# Altium PCB LKAS-EPS_PCB_V2I4.PcbDoc (part 1 of 2)
Units mil, origin at the board's own origin, x right, y up, seen from the top; angles counter-clockwise.
Board outline 1945 x 1335 mil, 4 copper layers (Top Layer, Layer 1, Layer 2, Bottom Layer), stack 23.712 mil thick; 51 components, 66 nets, 233 pads, 107 vias.
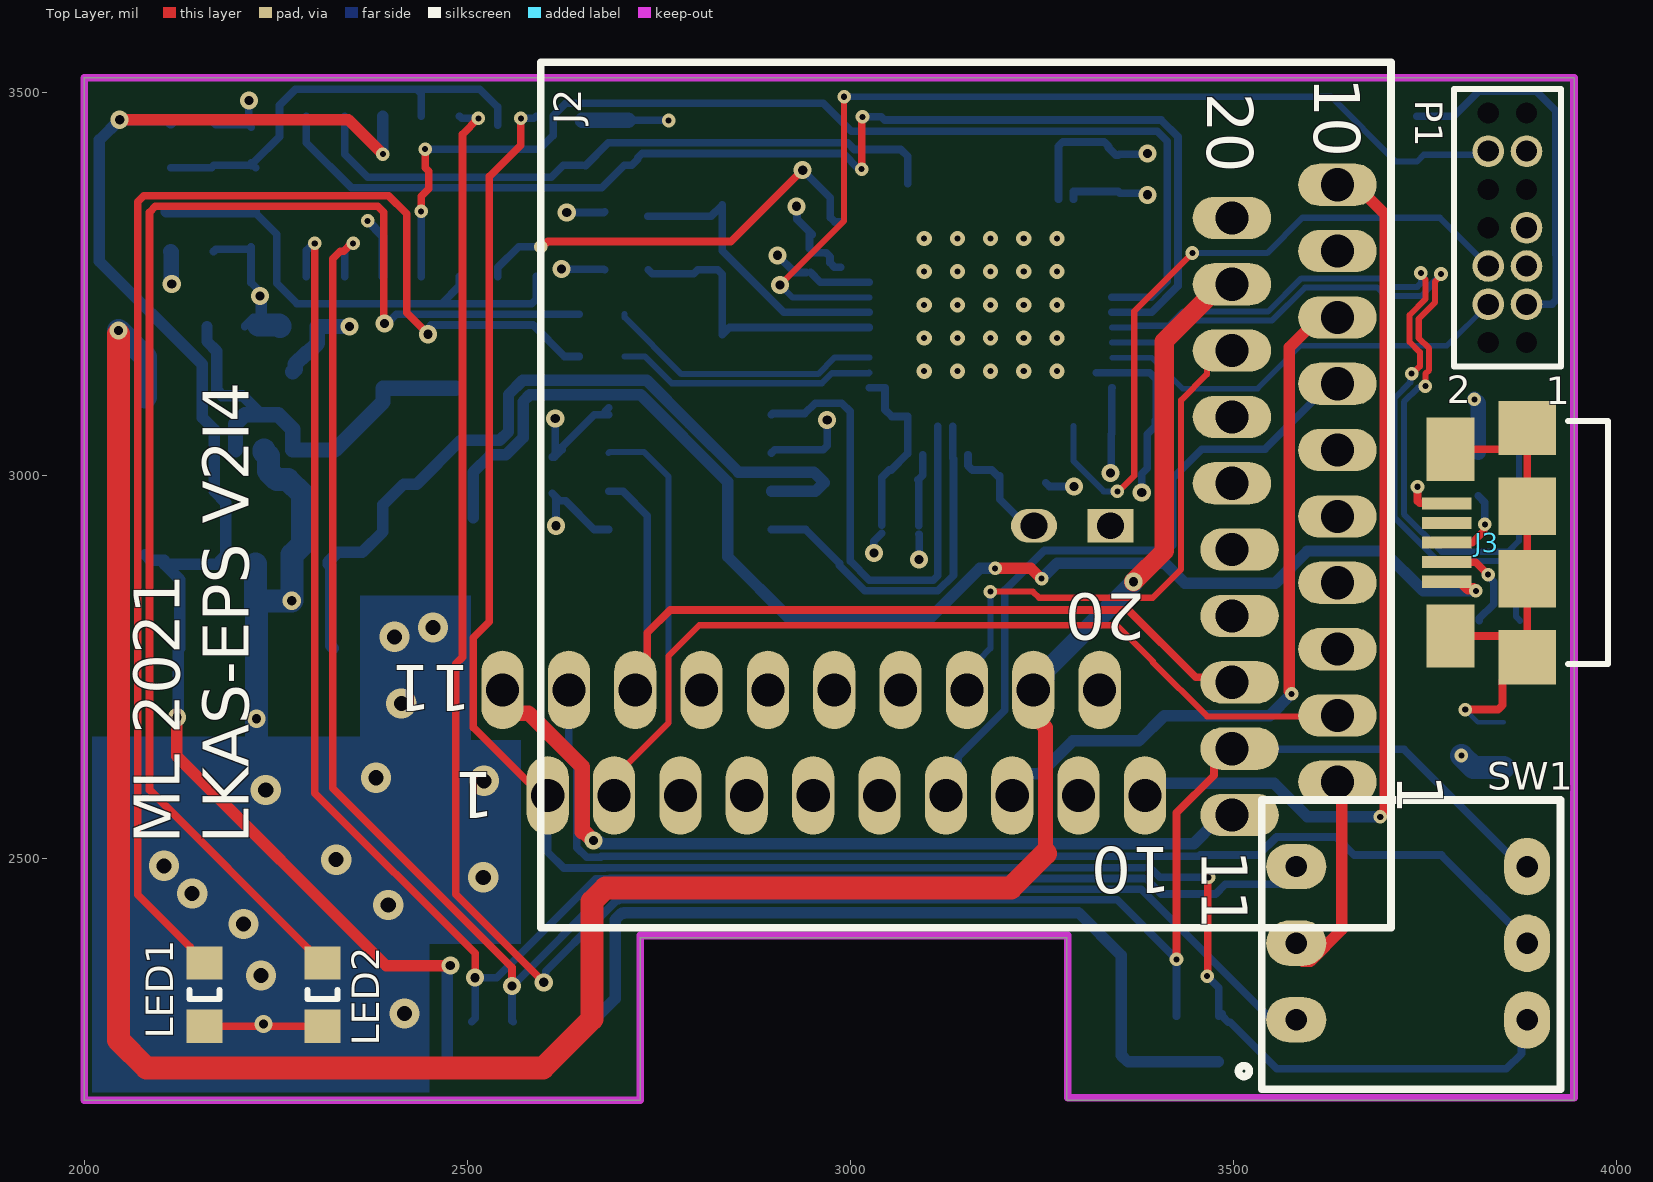
[diagram p0: Top Layer view]
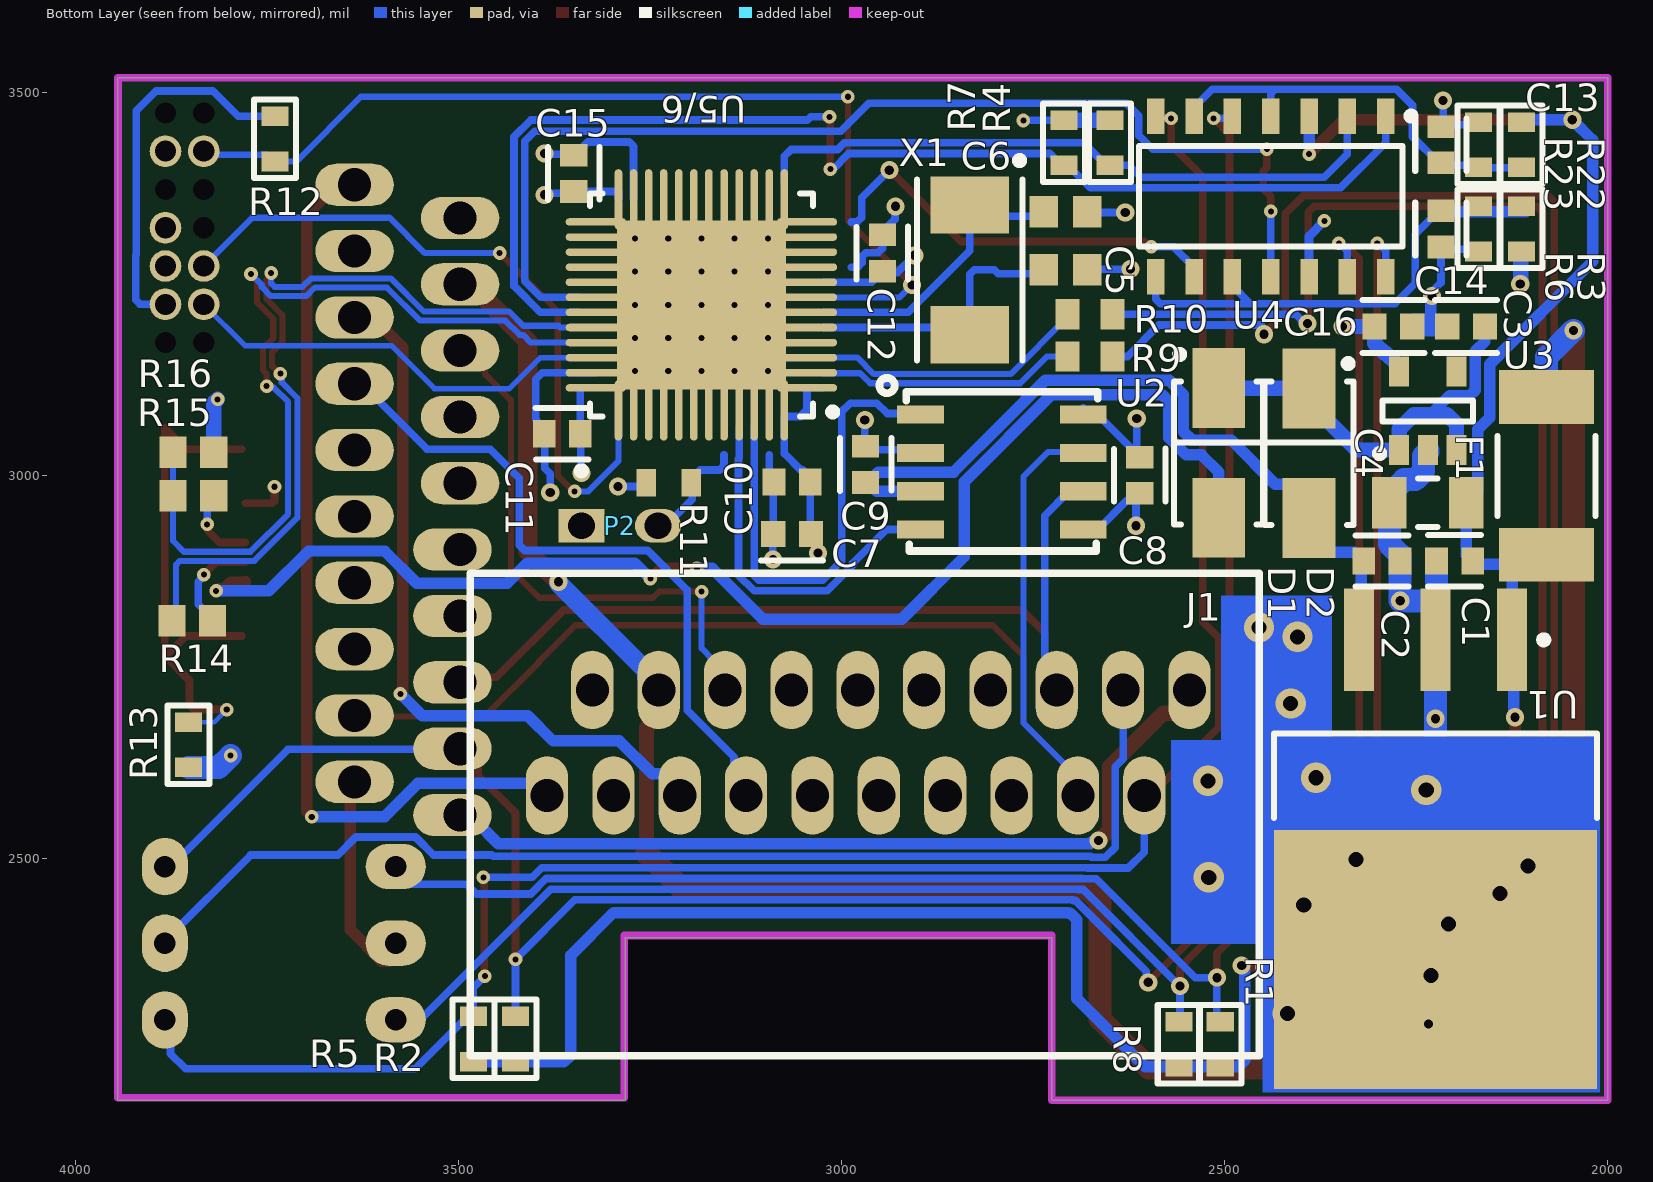
[diagram p1: Bottom Layer view, seen from below]
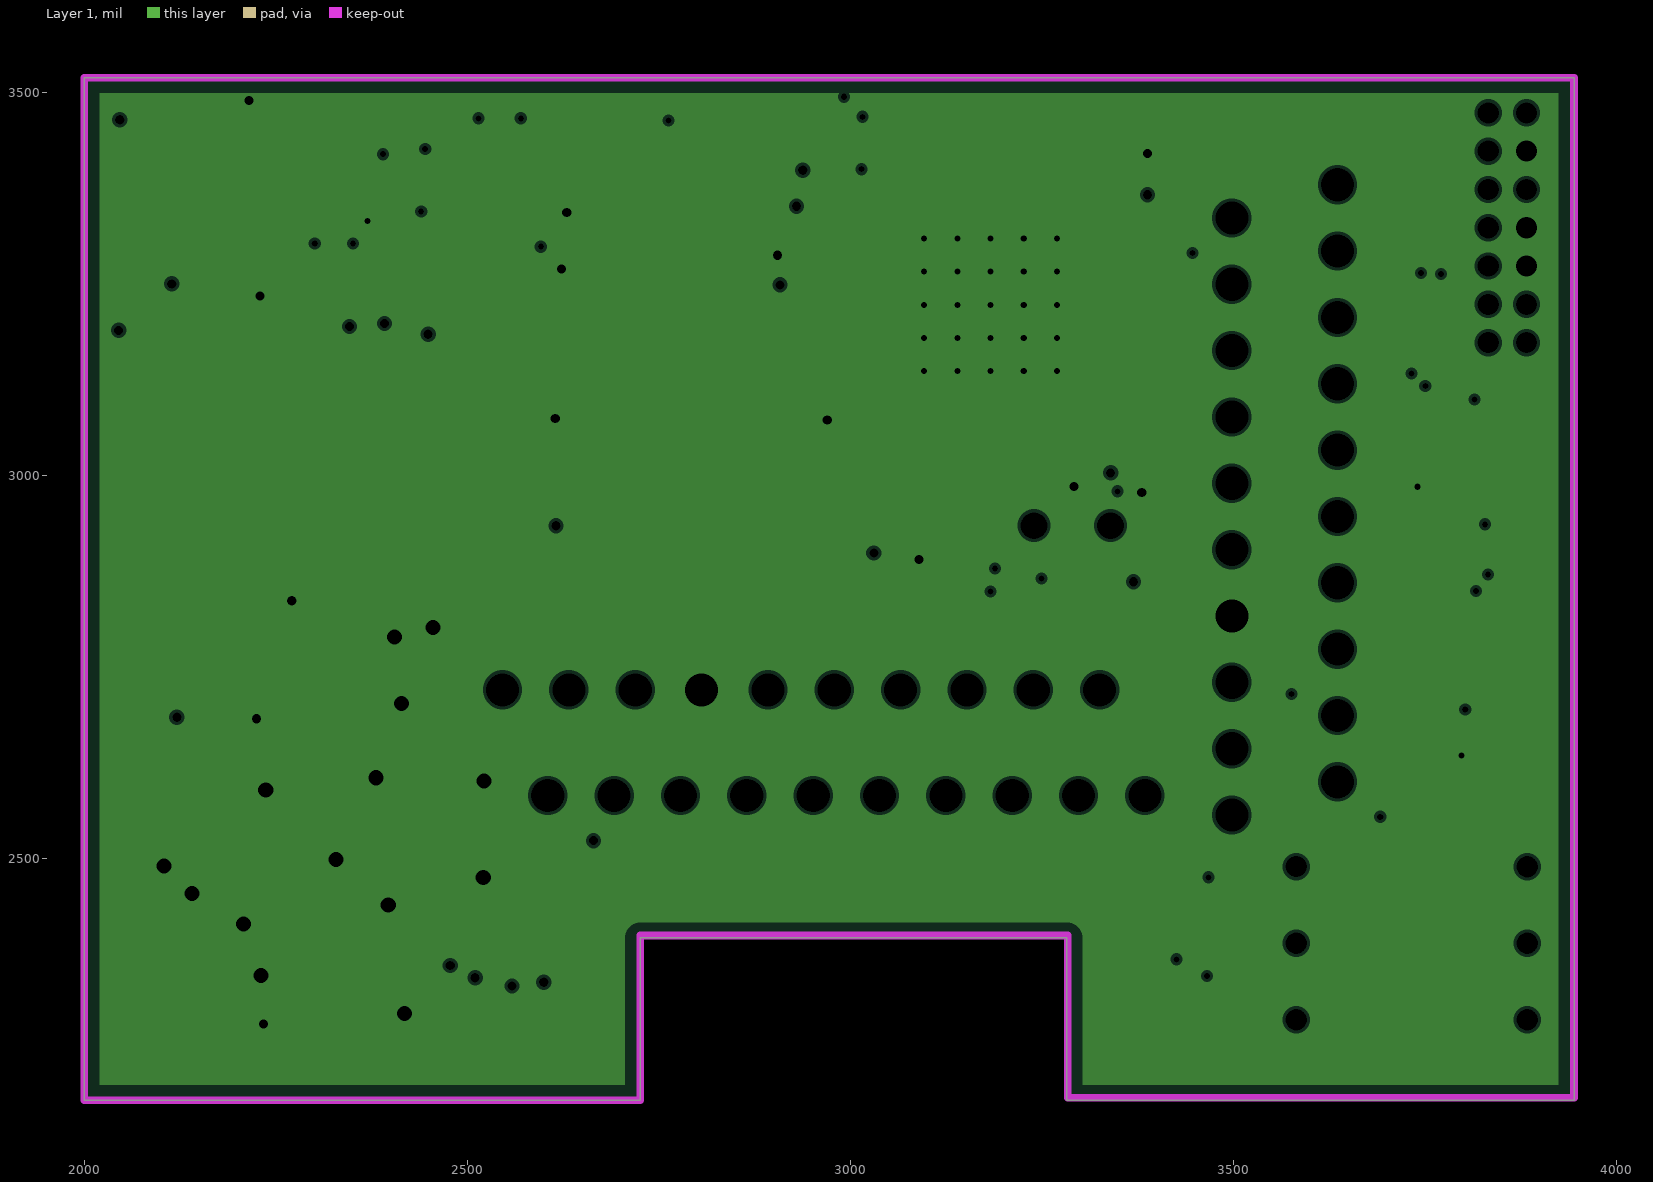
[diagram p2: Layer 1, clearances drawn from the general rule]
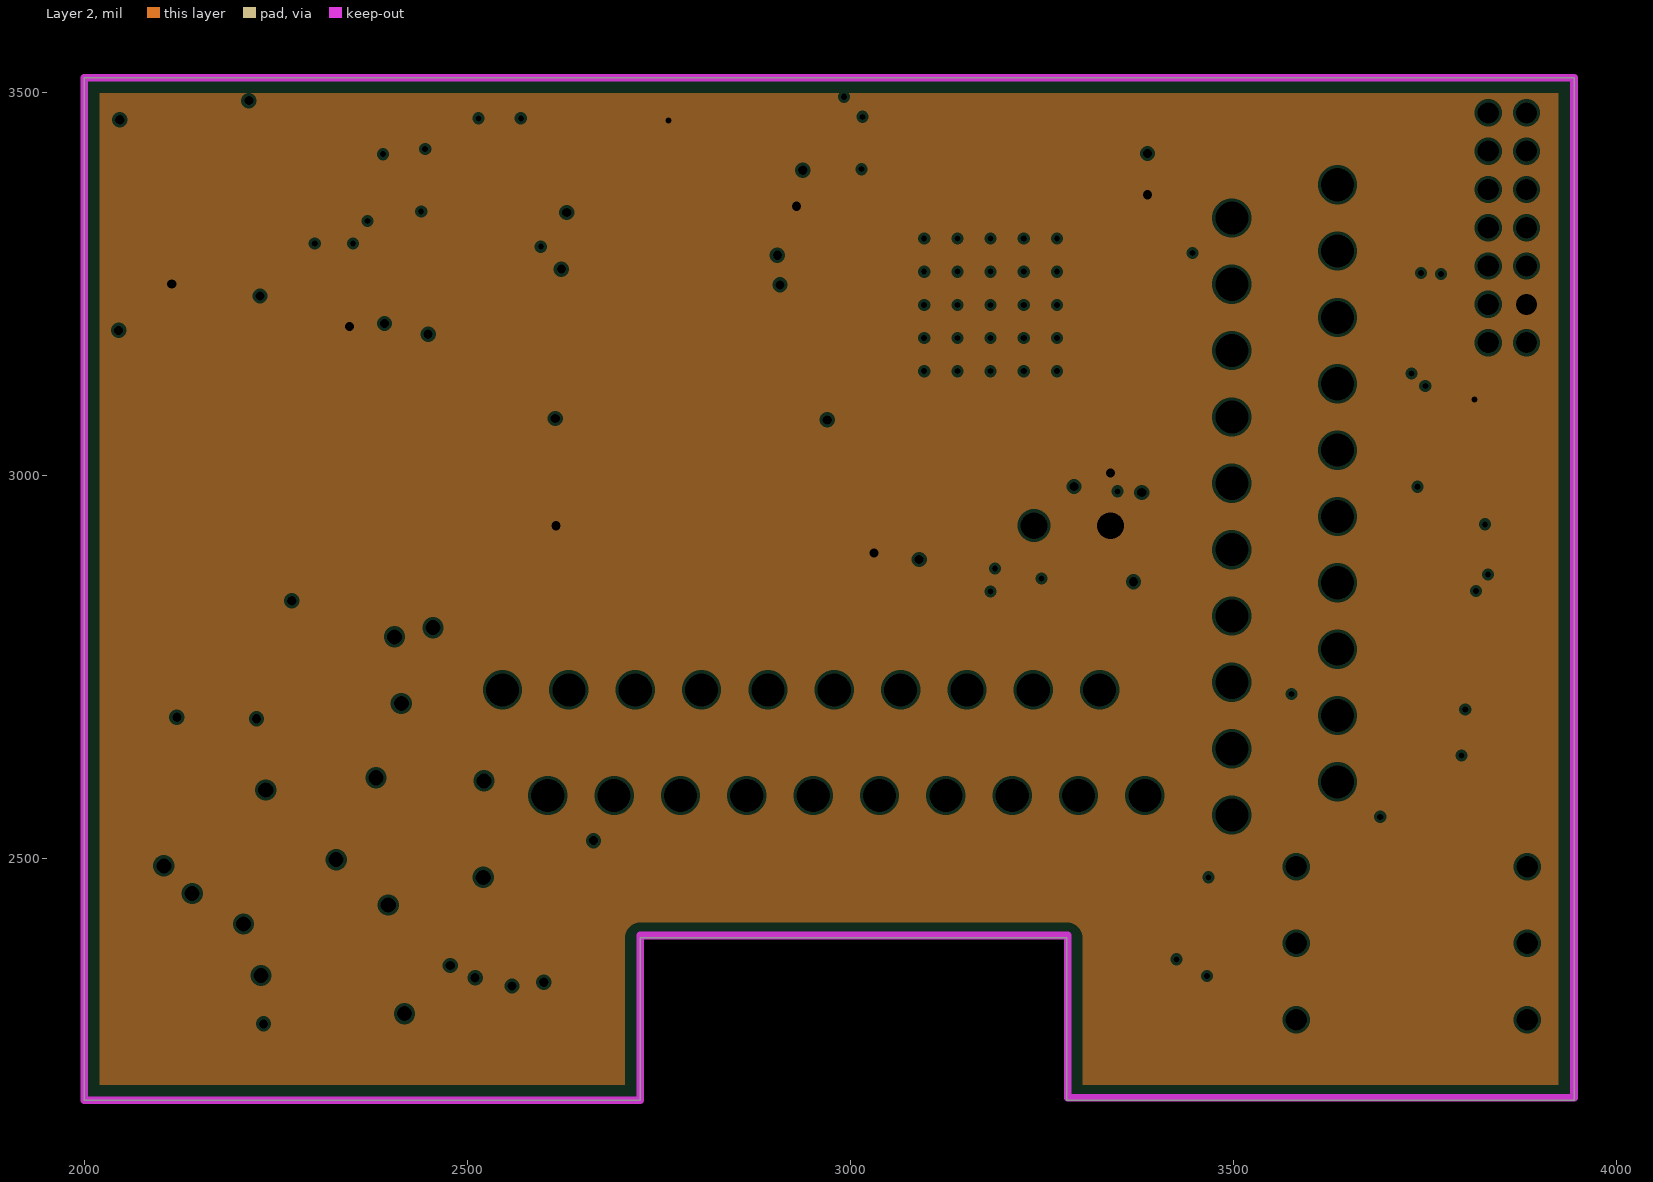
[diagram p3: Layer 2, clearances drawn from the general rule]
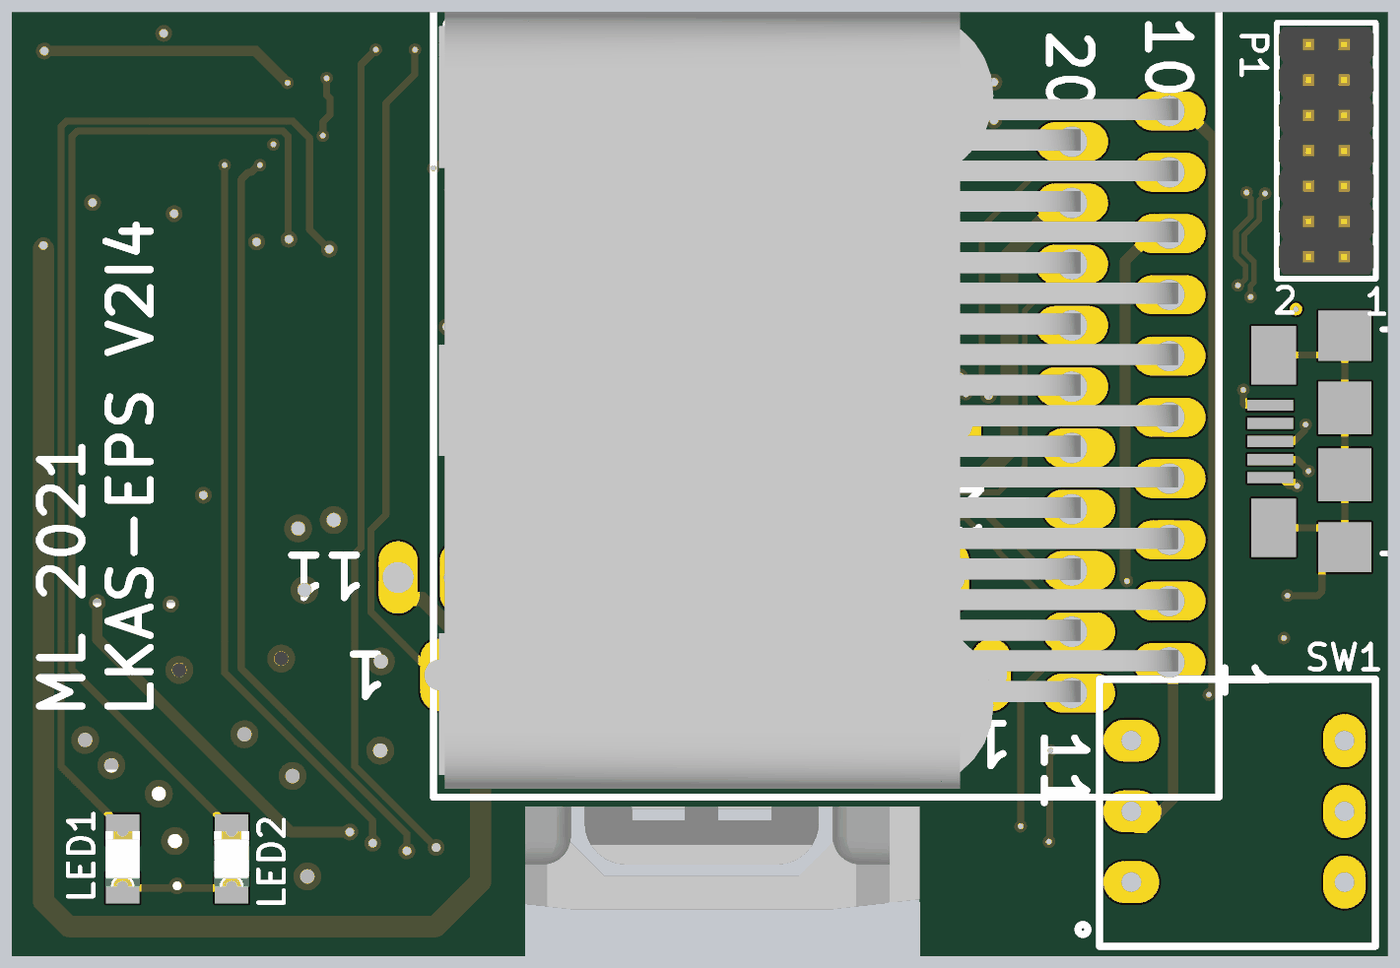
[diagram p4: 3D render of the assembled board from above, using the file's embedded part models]
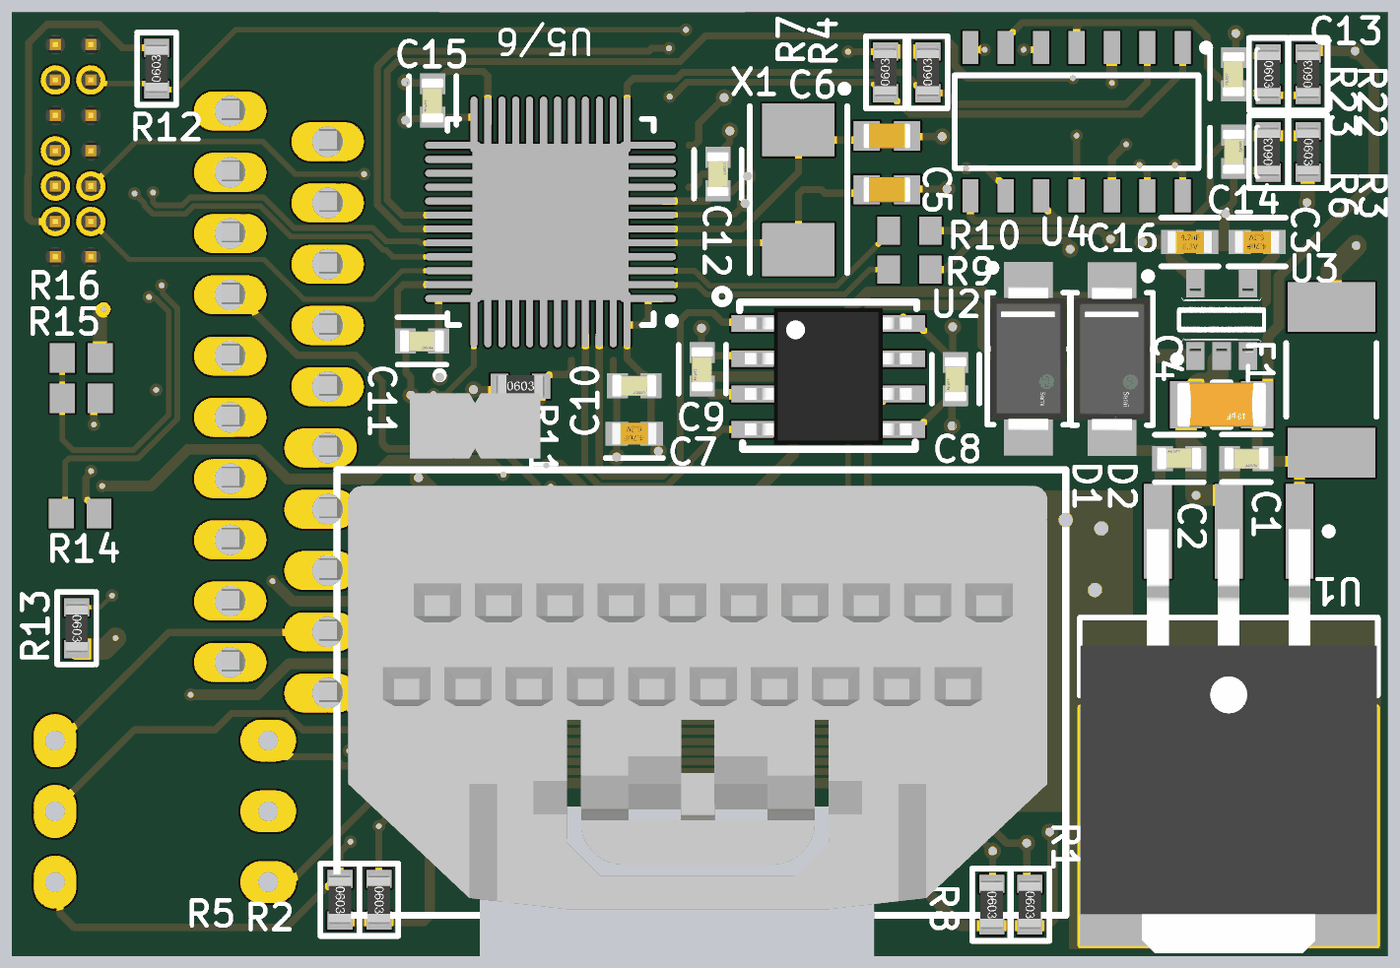
[diagram p5: 3D render of the assembled board from below, using the file's embedded part models]

## Layer stack, top to bottom
Top Solder: solder mask 0.4, Solder Resist, Dk 3.5
Top Layer: signal copper 1.378
Dielectric 1: prepreg 2.8, PP-006, Dk 4.1
Layer 1: plane copper 1.378, net GND
Dielectric1: dielectric 12.6, FR-4, Dk 4.8
Layer 2: plane copper 1.378, net +3V3
Dielectric 2: prepreg 2.8, PP-006, Dk 4.1
Bottom Layer: signal copper 1.378
Bottom Solder: solder mask 0.4, Solder Resist, Dk 3.5

## Board outline
2000,2185 2726,2185 2726,2397 3283,2397 3283,2185 3945,2185 3945,3520 2000,3520

## Design rules (kind name [scope] priority, off if disabled: settings)
BoardOutlineClearance [All] p1: gap=7.87 ignorepadtopadclearanceinfootprint=FALSE
Clearance [All] p1: gap=4 ignorepadtopadclearanceinfootprint=FALSE except(5: Arc-Via Track-Via SMDPad-Via THPad-Via Via-Via Via-Fill Via-Poly Via-Region Via-Text; 9.84: Arc-Hole Track-Hole SMDPad-Hole THPad-Hole Via-Hole Fill-Hole Poly-Hole Region-Hole Text-Hole)
ComponentClearance [All] p1: gap=4 collisioncheckmode=3 verticalgap=4 showdistances=TRUE
DiffPairsRouting [All] p1: maxlimit=4 minlimit=4 mostfreqgap=4 toplayer_minwidth=4 toplayer_maxwidth=71497.94 toplayer_prefwidth=4 bottomlayer_minwidth=4 bottomlayer_maxwidth=71497.94 bottomlayer_prefwidth=4 maxuncoupledlength=500
Height [All] p1: minheight=0 maxheight=71497.94 prefheight=500
HoleSize [All] p1: absolutevalues=TRUE maxlimit=248.03 minlimit=7.87 maxpercent=80.000 minpercent=20.000
HoleToHoleClearance [All] p1: gap=9.84 allowstackedmicrovias=FALSE
MatchedLengths "Schematic Matched Net Lengths" [InNet('USB_N')] p1: tolerance=150 checknetsindiffpair=FALSE checkdiffpairvsdiffpair=TRUE checkxsignals=TRUE checkothers=TRUE
MinimumAnnularRing [All] p1: minimumring=3
MinimumSolderMaskSliver [All] p1: minsoldermaskwidth=0
PlaneClearance [All] p1: clearance=4
PlaneConnect PlaneConnectPowerPads [InPadClass('PowerPads')] p1: planeconnectstyle=Direct reliefexpansion=20 reliefentries=4 reliefconductorwidth=10 reliefairgap=10
PlaneConnect [All] p2: pad.planeconnectstyle=Relief pad.reliefexpansion=11.81 pad.reliefentries=4 pad.reliefconductorwidth=4 pad.reliefairgap=4 via.planeconnectstyle=Direct via.reliefexpansion=11.81 via.reliefentries=4 via.reliefconductorwidth=5 via.reliefairgap=5
PolygonConnect PolygonConnectPowerPads [All vs (InPadClass('PowerPads'))] p1: connectstyle=Direct reliefconductorwidth=10 reliefentries=4 polygonreliefangle="90 Angle" airgapwidth=10
PolygonConnect [All] p2: thpad.connectstyle=Relief thpad.reliefconductorwidth=4 thpad.reliefentries=4 thpad.polygonreliefangle="90 Angle" thpad.airgapwidth=4 smdpad.connectstyle=Relief smdpad.reliefconductorwidth=4 smdpad.reliefentries=4 smdpad.polygonreliefangle="90 Angle" smdpad.airgapwidth=4 via.connectstyle=Direct via.reliefconductorwidth=5 via.reliefentries=4 via.polygonreliefangle="90 Angle" via.airgapwidth=5
RoutingVias [All] p1: holewidth=7.87 width=17.72 viastyle="Through Hole" minholewidth=7.87 minwidth=17.72 maxholewidth=248.03 maxwidth=257.87
SilkToSilkClearance [All] p1: silktosilkclearance=0
SilkToSolderMaskClearance [IsPad] p1: minsilkscreentomaskgap=4 clearancetoexposedcopper=TRUE
SolderMaskExpansion [All] p1: expansion=2.95 istentingtop=FALSE
UnRoutedNet [All] p1: checkbadconnections=TRUE
Width [All] p1: maxlimit=71497.94 minlimit=4 preferedwidth=6 minimp=50.000000 maximp=50.000000 favimp=50.000000
19 further rules are at their usual default settings.

## Classes and differential pairs
differential pair USB_R: +USB_R_P -USB_R_N
differential pair USB: +USB_P -USB_N

## Components (designator, comment, footprint, x,y, rotation, side; value= is the part's Value field where it differs from the comment)
C1 "C0603C104M3RACTU" FP-C0603C-CF-MFG 2200,2889 r0 bottom value="0.10 μF"
C2 "C0603C104M3RACTU" FP-C0603C-CF-MFG 2295,2889 r180 bottom value="0.10 μF"
C3 "CL10B475KQ8NQNC" FP-CL10-IPC_C 2185,3195 r0 bottom value=4.7uF
C4 "CL31A106KBHNNNE" FP-CL31-IPC_C 2235,2965 r0 bottom value=10uF
C5 "GRM1885C1H220JA01D" CAPC1608X90X35ML10T15 2708,3269 r180 bottom
C6 "GRM1885C1H220JA01D" CAPC1608X90X35ML10T15 2708,3345 r180 bottom
C7 "CL10B475KQ8NQNC" FP-CL10-IPC_C 3065,2924 r0 bottom value=4.7uF
C8 "C0603C104M3RACTU" FP-C0603C-CF-MFG 2611,3001 r90 bottom value="0.10 μF"
C9 "C0603C104M3RACTU" FP-C0603C-CF-MFG 2969,3015 r90 bottom value="0.10 μF"
C10 "C0603C104M3RACTU" FP-C0603C-CF-MFG 3065,2992 r0 bottom value="0.10 μF"
C11 "C0603C104M3RACTU" FP-C0603C-CF-MFG 3365,3055 r0 bottom value="0.10 μF"
C12 "C0603C104M3RACTU" FP-C0603C-CF-MFG 2947,3291 r270 bottom value="0.10 μF"
C13 "C0603C104M3RACTU" FP-C0603C-CF-MFG 2217.96,3432.26 r90 bottom value="0.10 μF"
C14 "C0603C104M3RACTU" FP-C0603C-CF-MFG 2217.84,3322.51 r270 bottom value="0.10 μF"
C15 "C0603C104M3RACTU" FP-C0603C-CF-MFG 3350,3395 r90 bottom value="0.10 μF"
C16 "CL10B475KQ8NQNC" FP-CL10-IPC_C 2280,3195 r180 bottom value=4.7uF
D1 "SS14" FP-403AE-MFG 2508,3030 r90 bottom
D2 "SS14" FP-403AE-MFG 2390,3029.65 r90 bottom
F1 "1812L050/30PR" LFUS-1812L05030PR_V 2080,3000 r270 bottom
J1 "MX34020SF1" MX34020SF1 3375.24,2792.87 r180 bottom
J2 "MX34020NF1" MX34020NF1 3636.14,3380.16 r270 top locked
J3 "10118192-0001LF" FCI-10118192-0001LF-5_V 3884,2913 r90 top
LED1 "150080SS75000" 0805_A 2157,2323 r90 top
LED2 "150080BS75000" 0805_A 2311,2323 r90 top
P1 "62201421121" 62201421121 3858,3324 r90 top
P2 "5-146280-2" TECO-5-146280-2_V 3290,2935 r180 bottom
R1 "4K7" R0603 2506,2258 r270 bottom
R2 "4K7" R0603 3426,2265 r270 bottom
R3 "4K7" R0603 2112.89,3322.51 r270 bottom
R4 "4K7" R0603 2650,3435 r90 bottom
R5 "4K7" R0603 3481,2265 r270 bottom
R6 "4K7" R0603 2168.87,3322.51 r90 bottom
R7 "4K7" R0603 2710,3435 r90 bottom
R8 "4K7" R0603 2560,2258 r270 bottom
R9 "RC0603FR-07560RL" RESC1608X55X25ML10T15 2676,3156 r180 bottom
R10 "RC0603FR-07560RL" RESC1608X55X25ML10T15 2676,3211 r180 bottom
R11 "4K7" R0603 3226,2991 r180 bottom
R12 "4K7" R0603 3740,3440 r90 bottom
R13 "4K7" R0603 3853,2649 r270 bottom
R14 "CRCW060322R0JNTA" RESC1609X50X30ML10T20 3848,2811 r180 bottom value=22R
R15 "CRCW060322R0JNTA" RESC1609X50X30ML10T20 3846.57,2974 r180 bottom value=22R
R16 "CRCW06031K50FKTA" RESC1609X50X30ML10T20 3846.57,3031 r180 bottom
R22 "4K7" R0603 2112.89,3432.26 r90 bottom
R23 "4K7" R0603 2168.87,3432.26 r270 bottom
SW1 "76STC02T" 76STC02T 3733,2390 r90 top
U1 "UA7805CKTTR" KTT0003A_V 2225,2526.16 r270 bottom
U2 "MCP2562FD-E/SN" MCP2561 2791,3005 r180 bottom
U3 "MIC5504-3.3YM5-TR" FP-SOT23-5LD-PL-1-MFG 2235,3085 r90 bottom
U4 "LM339DR2G" ONSC-SOIC-14-751A-03_V 2440,3365 r270 bottom
U5/6 "STM32F103C6U6A" STM-UFQFPN48_M 3183.31,3223.31 r0 bottom (schematic designator U6)
X1 "ABM7-8.000MHZ-D2Y-T" ABRA-ABM7-2_V 2833,3269 r270 bottom

## Footprints (in the part's own frame and the unit in brackets; to place one, negate y for a bottom-side part, rotate by r counter-clockwise, add the part's x,y. Pads: shape width x height; smd on the part's side, far side on the other; paste and mask are expansions set on the pad)
76STC02T [mm] "Switch Rocker Arm"
  oval 1.5x2 hole 0.71: 1A(-2.538,3.827) 2A(2.542,3.827) C1(0.002,3.827)
  oval 1.905x1.524 hole 0.71: 1B(-2.542,-3.827) 2B(2.538,-3.827) C2(-0.002,-3.827)
  silkscreen extent -4.85,-4.93 4.75,5.74
0805_A [mm] "Chip LED, 2-Leads, Body 2.0x1.3mm, IPC Medium Density"
  rect 1.1x1.2 smd: 1(-1.05,0) 2(1.05,0)
  silkscreen extent -0.15,-0.5 0.15,0.5, body extent -1,-0.63 1,0.62, height 0.68
62201421121 [mm] "Pin Header, pitch 1.27 mm, THT, Vertical, dual row, 14p"
  round 0 hole 0.7 unplated: 1(-3.81,-0.635) 2(-3.81,0.635) 8(0,0.635) 9(1.27,-0.635) 10(1.27,0.635) 13(3.81,-0.635) 14(3.81,0.635)
  round 1.05 hole 0.7: 3(-2.54,-0.635) 4(-2.54,0.635) 5(-1.27,-0.635) 6(-1.27,0.635) 7(0,-0.635) 11(2.54,-0.635) 12(2.54,0.635)
  silkscreen extent -4.59,-1.78 4.59,1.78, body extent -4.44,-1.7 4.45,1.7, height 5.33
ABRA-ABM7-2_V [mm] "SMD, 2-Leads, Body 6x3.5mm"
  rect 1.9x2.6 smd: 1(-2.15,0) 2(2.15,0)
  silkscreen extent -3.75,-1.75 3,1.78, body extent -3,-1.75 3,1.75, height 1.4
CAPC1608X90X35ML10T15 [mm] "Chip Capacitor, 2-Leads, Body 1.7x0.9mm, IPC Low Density"
  rect 0.95x1.05 smd: 1(-0.725,0) 2(0.725,0)
  body extent -0.85,-0.45 0.85,0.45, height 0.9
FCI-10118192-0001LF-5_V [mm] "SMD, 5-Leads, Body 8.05x5.77mm, Pitch 0.65mm"
  rect 0.4x1.65 smd: 1(-1.3,2.675) 2(-0.65,2.675) 3(0,2.675) 4(0.65,2.675) 5(1.3,2.675)
  rect 2.1x1.6 smd: 6(-3.1,2.55) 7(3.1,2.55)
  rect 1.8x1.9 smd: 8(-3.8,0) 9(3.8,0)
  rect 1.9x1.9 smd: 10(-1.2,0) 11(1.2,0)
  silkscreen extent -4.03,-2.67 4.03,-1.35, body extent -4.03,-2.67 4.03,3.1, height 2.7
FP-403AE-MFG [mm]
  rect 2.65x1.75 smd paste+0 mask+0: 1(-2.15,0) 2(2.15,0)
  silkscreen extent -2.37,-1.48 3.39,1.48, body extent -2.6,-1.36 2.6,1.36, height 2.5
FP-C0603C-CF-MFG [mm]
  rect 0.75x0.9 smd paste+0 mask+0: 1(-0.6,0) 2(0.6,0)
  silkscreen extent -0.87,-0.85 0.88,0.85, body extent -0.8,-0.4 0.8,0.4, height 0.87
FP-CL10-IPC_C [mil]
  rect 31.73x33.79 smd paste+0 mask+0: 1(-24.65,0) 2(24.65,0)
  silkscreen extent -41,-34 41,34, body extent -31,-16 31,16, height 37
FP-CL31-IPC_C [mil]
  rect 45.45x67.17 smd: 1(-50.23,0) 2(50.23,0)
  silkscreen extent -13,-31 13,31, body extent -63,-31 63,31, height 71
FP-SOT23-5LD-PL-1-MFG [mm]
  rect 1x0.66 smd paste+0 mask+0: 1(-1.3,0.95) 2(-1.3,0) 3(-1.3,-0.95) 4(1.3,-0.95) 5(1.3,0.95)
  silkscreen extent -1.54,-1.5 0.35,1.73, body extent -1.4,-1.45 1.4,1.45, height 1.45
KTT0003A_V [mm] "DPAK, 3-Leads, Body 10.65x9.65mm, Pitch 2.54mm"
  rect 3.4x1 smd: 1(-6.6,2.54) 2(-6.6,0) 3(-6.6,-2.54)
  rect 8.6x10.7 smd: 4(4,0)
  silkscreen extent -6.72,-5.35 -0.7,5.35, body extent -6.68,-5.32 8.56,5.32, height 4.83
LFUS-1812L05030PR_V [mm] "SMD, 2-Leads, Body 4.55x3.24mm"
  rect 1.78x3.15 smd: 1(-2.615,0) 2(2.615,0)
  silkscreen extent -1.33,-1.62 1.33,1.62, body extent -2.27,-1.62 2.27,1.62, height 1
MCP2561 [mm] "SOIC 8 SN type"
  rect 1.55x0.6 smd: 1(-2.7,1.905) 2(-2.7,0.635) 3(-2.7,-0.635) 4(-2.7,-1.905) 5(2.7,-1.905) 6(2.7,-0.635) 7(2.7,0.635) 8(2.7,1.905)
  silkscreen extent -4.06,-2.62 3.18,3.12, body extent -3,-2.45 3,2.45, height 1.75
MX34020NF1 [mm] "Receptical with male pins"
  oval 1.4x2.6 hole 1.1: 1(19.8,0) 2(17.6,0) 3(15.4,0) 4(13.2,0) 5(11,0) 6(8.8,0) 7(6.6,0) 8(4.4,0) 9(2.2,0) 10(0,0) 16(9.9,-3.5) 17(7.7,-3.5) 18(5.5,-3.5) 19(3.3,-3.5) 20(1.1,-3.5)
  oval 1.4x2.6 hole 1.1 copper offset 0,0.254: 11(20.9,-3.5) 12(18.7,-3.5) 13(16.5,-3.5) 14(14.3,-3.5) 15(12.1,-3.5)
  silkscreen extent -4.06,-26.42 24.64,1.78, body extent -3.56,-26.21 24.34,0.31, height 16
MX34020SF1 [mm] "Plug without pins"
  oval 1.4x2.6 hole 1.1: 1(19.558,-5.334) 2(17.358,-5.334) 3(15.158,-5.334) 4(12.958,-5.334) 5(10.758,-5.334) 6(8.558,-5.334) 7(6.358,-5.334) 8(4.158,-5.334) 9(1.958,-5.334) 10(-0.242,-5.334) 11(21.058,-1.834) 12(18.858,-1.834) 13(16.658,-1.834) 14(14.458,-1.834) 15(12.258,-1.834) 16(10.058,-1.834) 17(7.858,-1.834) 18(5.658,-1.834) 19(3.458,-1.834) 20(1.258,-1.834)
  silkscreen extent -2.79,-13.97 23.37,2.03, body extent -2.39,-13.75 22.71,1.45, height 21
ONSC-SOIC-14-751A-03_V [mm] "SOIC, 14-Leads, Body 8.75x4mm, Pitch 1.27mm"
  rect 1.18x0.58 smd: 1(-2.66,3.81) 2(-2.66,2.54) 3(-2.66,1.27) 4(-2.66,0) 5(-2.66,-1.27) 6(-2.66,-2.54) 7(-2.66,-3.81) 8(2.66,-3.81) 9(2.66,-2.54) 10(2.66,-1.27) 11(2.66,0) 12(2.66,1.27) 13(2.66,2.54) 14(2.66,3.81)
  silkscreen extent -2.78,-4.37 1.67,4.77, body extent -2,-4.38 2,4.38, height 1.75
R0603 [mm]
  rect 0.65x0.9 smd: 1(-0.75,0) 2(0.75,0)
  silkscreen extent -1.3,-0.7 1.3,0.7, body extent -1.05,-0.4 1.05,0.4, height 0.5
RESC1608X55X25ML10T15 [mm] "Chip Resistor, 2-Leads, Body 1.70x0.90mm, IPC Low Density"
  rect 0.8x1 smd: 1(-0.75,0) 2(0.75,0)
  body extent -0.85,-0.45 0.85,0.45, height 0.55
RESC1609X50X30ML10T20 [mm] "Chip Resistor, 2-Leads, Body 1.55x0.85mm, IPC Low Density"
  rect 0.9x1.05 smd: 1(-0.675,0) 2(0.675,0)
  body extent -0.82,-0.48 0.82,0.48, height 0.5
STM-UFQFPN48_M [mm] "QFN, 48-Leads, Body 7.1x7.1mm, Pitch 0.5mm, Thermal Pad 5.6x5.6mm, IPC Low Density"
  oval 2x0.25 smd: 1(-3.5,2.75) 2(-3.5,2.25) 3(-3.5,1.75) 4(-3.5,1.25) 5(-3.5,0.75) 6(-3.5,0.25) 7(-3.5,-0.25) 8(-3.5,-0.75) 9(-3.5,-1.25) 10(-3.5,-1.75) 11(-3.5,-2.25) 12(-3.5,-2.75) 25(3.5,-2.75) 26(3.5,-2.25) 27(3.5,-1.75) 28(3.5,-1.25) 29(3.5,-0.75) 30(3.5,-0.25) 31(3.5,0.25) 32(3.5,0.75) 33(3.5,1.25) 34(3.5,1.75) 35(3.5,2.25) 36(3.5,2.75)
  oval 0.25x2 smd: 13(-2.75,-3.5) 14(-2.25,-3.5) 15(-1.75,-3.5) 16(-1.25,-3.5) 17(-0.75,-3.5) 18(-0.25,-3.5) 19(0.25,-3.5) 20(0.75,-3.5) 21(1.25,-3.5) 22(1.75,-3.5) 23(2.25,-3.5) 24(2.75,-3.5) 37(2.75,3.5) 38(2.25,3.5) 39(1.75,3.5) 40(1.25,3.5) 41(0.75,3.5) 42(0.25,3.5) 43(-0.25,3.5) 44(-0.75,3.5) 45(-1.25,3.5) 46(-1.75,3.5) 47(-2.25,3.5) 48(-2.75,3.5)
  rect 5.6x5.6 smd: 49(0,0)
  silkscreen extent -4.47,-3.7 3.7,3.7, body extent -3.55,-3.55 3.55,3.55, height 0.6
TECO-5-146280-2_V [mil] "Connector, 2-Leads, Body 4.67x2.34mm, Pitch 2.54mm"
  rect 60x44 hole 35.04: 1(-50,0)
  oval 60x44 hole 35.04: 2(50,0)
  silkscreen extent -55,67 -45,77, body extent -92,-46 92,46, height 210

## Part data
C1 C2 C8 C9 C10 C11 C12 C13 C14 C15: library part CMP-2006-03065-2, "CAP CER 0.1UF 25V X7R 0603", Capacitance="0.1 μF", Manufacturer=KEMET, Package=C0603C-CF, Temperature="-55°C to +125°C", Temperature Characteristic=X7R, Temperature Coefficient=30ppm/°C, Temperature Range High=+125°C, Temperature Range Low=-55°C, Tolerance=0.2, Voltage Rating="25 V", Automotive=Yes, Automotive Grade="Grade 1", Category=Cap, ComponentLink2Description=Datasheet, ComponentLink2URL=https://api.kemet.com/component-edge/download/datasheet/C0603C100J5GACAUTO.pdf, Device Class L1="Passive Components", Device Class L2=Capacitors, Device Class L3="Ceramic Capacitors", Digikey Description="CAP CER 0.1UF 25V X7R 0603", Height=0.87mm, Lead Free=Yes, Manufacturer Part Number=C0603C104M3RACTU, Material=Ceramic, Mouser Description="Multilayer Ceramic Capacitors MLCC - SMD/SMT 25volts 0.1uF X7R 20%", Octopart=https://octopart.com/c0603c104m3ractu-kemet-95914, RoHS=TRUE
C3 C7 C16: library part CMP-2000-06096-2, "CAP CER 4.7UF 6.3V X7R 0603", Capacitance=4.7uF, Manufacturer=Samsung, Package=CL10, Temperature="-55°C to +125°C", Temperature Characteristic=X7R, Temperature Coefficient=15%, Temperature Range High=+125°C, Temperature Range Low=-55°C, Tolerance=10%, Voltage Rating=6.3V, Automotive=No, Category=Cap, ComponentLink2Description=Datasheet, ComponentLink2URL=http://www.samsungsem.com/kr/support/product-search/mlcc/__icsFiles/afieldfile/2018/07/24/CL10B475KQ8NQNC.pdf, Device Class L1="Passive Components", Device Class L2=Capacitors, Device Class L3="Ceramic Capacitors", Digikey Description="CAP CER 4.7UF 6.3V X7R 0603", Height=0.95mm, Ipc Land Pattern Name=CAPC16080X80, Lead Free=Yes, Manufacturer Part Number=CL10B475KQ8NQNC, Material=Ceramic, Mouser Description="C Series 0402 4.7 uF 6.3 V ±20 % Tolerance X5R SMT Multilayer Ceramic Capacitor", Octopart=https://octopart.com/cl10b475kq8nqnc-samsung-24957976, RoHS=TRUE
C4: library part CMP-13271-000016-1, "CAP CER 10UF 50V X5R 1206", Capacitance=10uF, Manufacturer=Samsung, Package=CL31, Temperature="-55°C to +85°C", Temperature Characteristic=X5R, Temperature Coefficient=15%, Temperature Range High=+85°C, Temperature Range Low=-55°C, Tolerance=10%, Voltage=50V, Automotive=No, Category=Cap, ComponentLink2Description=Datasheet, ComponentLink2URL=http://www.samsungsem.com/kr/support/product-search/mlcc/__icsFiles/afieldfile/2018/06/21/CL31A106KBHNNNE.pdf, Device Class L1="Passive Components", Device Class L2=Capacitors, Device Class L3="Ceramic Capacitors", Digikey Description="CAP CER 10UF 50V X5R 1206", Height=1.8mm, Ipc Land Pattern Name=CAPC320160X160, Lead Free=Yes, Manufacturer Part Number=CL31A106KBHNNNE, Material=Ceramic, Octopart=https://octopart.com/cl31a106kbhnnne-samsung-19832778, RoHS=TRUE, Voltage Rating=50V
C5 C6: library part CMP-2000-04945-1, "Chip Capacitor, 22 pF, +/- 5%, 50 V, -55 to 125 degC, 0603 (1608 Metric), RoHS, Tape and Reel", Capacitance=22pF, Case Size/Dimension=0603, Dielectric=C0G, Manufacturer=Murata, Package Description="2-Pin Surface Mount Device, Body 1.6 x 0.8 mm", Package Reference=603, Rated Voltage=50V, Tolerance (%)=±5%, Datasheet URL=https://datasheet.ciiva.com/11786/0900766b807a1cab-11786398.pdf, Datasheet Version=Jul-06, Manufacturer URL=http://www.murata.com/
D1 D2: library part CMP-2000-04943-2, "DIODE SCHOTTKY 40V 1A SMA", Forward Current=1A, Manufacturer="ON Semiconductor", Max Junction Temp=+125°C, Max Repetitive Reverse Voltage=40V, Max Surge Forward Current=40A, Package=403AE, Peak Reverse Current=0.2mA, Temperature="-65°C to +125°C", Temperature Range Low=-65°C, Automotive=No, Category=Diode, ComponentLink2Description=Datasheet, ComponentLink2URL=https://www.onsemi.com/pub/Collateral/SS19-D.PDF, Device Class L1="Discrete Semiconductors", Device Class L2=Diodes, Device Class L3="Schottky Diodes", Digikey Description="DIODE SCHOTTKY 40V 1A SMA", Height=2.5mm, Lead Free=Yes, Manufacturer Part Number=SS14, Mouser Description="Schottky Diodes & Rectifiers SMA 40V 1.0A", Octopart=https://octopart.com/ss14-on+semiconductor-29205033, RoHS=TRUE, Standoff Height=0.05mm, Temperature Range High=+125°C
F1: library part CMP-2000-05508-1, "PTC Resettable Fuse, 0.8 W, 30 V, -40 to 85 degC, 2-Pin SMD, RoHS, Tape and Reel", Current - Hold (Ih) (Max)=500mA, Current - Max=100A, Current - Trip (It)=1A, Manufacturer=Littelfuse-Inc., Package / Case=1812(4532Metric),Concave, Package Description="2-Pin Surface Mount Device, Body 4.55 x 3.24 mm", Package Reference=1812, Voltage - Max=30V, Category=CircuitProtection, Datasheet URL=http://www.littelfuse.com/~/media/electronics/datasheets/resettable_ptcs/littelfuse_ptc_1812l_datasheet.pdf.pdf, Datasheet Version=02/2016, Family=PTCResettableFuses, Manufacturer URL=http://www.littelfuse.com/, Mounting Technology=SurfaceMount, Packaging=Tape&Reel(TR), R Min/Max=0.150~1.000Ohm, Series=POLY-FUSE®,1812L, Time to Trip=0.15s
J1: "Automotive Connectors Sckt HOUSING 20P", Color=Grey, Current Rating=3A, Manufacturer="JAE Electronics", Max Operating Temperature=85°C, Min Operating Temperature=-40°C, Package Quantity=192, Supplier Part Number 1=670-2925-ND, Category=Connectors, ComponentLink1Description=https://datasheet.ciiva.com/11742/0900766b80fc15d5-11742077.pdf?src-supplier=RSComponents, ComponentLink1URL=https://datasheet.ciiva.com/11742/0900766b80fc15d5-11742077.pdf?src-supplier=RSComponents, ComponentLink2Description=https://datasheet.ciiva.com/4553/sj038752-64597-4553699.pdf?src-supplier=Mouser, ComponentLink2URL=https://datasheet.ciiva.com/4553/sj038752-64597-4553699.pdf?src-supplier=Mouser, ComponentLink3Description=https://datasheet.ciiva.com/6739/614004-6739335.pdf?src-supplier=Newark, ComponentLink3URL=https://datasheet.ciiva.com/6739/614004-6739335.pdf?src-supplier=Newark, ComponentLink4Description=https://datasheet.ciiva.com/762/transportation-pg-v2-2-762885.pdf?src-supplier=Digi-Key, ComponentLink4URL=https://datasheet.ciiva.com/762/transportation-pg-v2-2-762885.pdf?src-supplier=Digi-Key, ComponentLink5Description=https://datasheet.ciiva.com/5821/1009688-5821398.pdf?src-supplier=Farnell, ComponentLink5URL=https://datasheet.ciiva.com/5821/1009688-5821398.pdf?src-supplier=Farnell, ComponentLink6Description=https://datasheet.ciiva.com/7648/1009712-7648886.pdf?src-supplier=Element14, ComponentLink6URL=https://datasheet.ciiva.com/7648/1009712-7648886.pdf?src-supplier=Element14, Connector Type=Receptacle,Socket,Rectangular, Contact Material="Copper Alloy,Copper", Contact Plating=Tin, Depth=21.3mm, Gender=Female, Height=14mm, Housing Material=PPE, Manufacturer Part Number=MX34020SF1, Mount="Free Hanging,Cable", Number of Contacts=20, Number of Positions=20, Number of Rows=2, Packaging=Tray, Pitch=0.087inch, Pricing 1="1=0.73000, 10=0.63800, 25=0.60000, 50=0.57500, 100=0.55000, 250=0.50000, 576=0.45000, 1152=0.40000, 2880=0.36250 (USD)", RoHS=Yes, Row Spacing=0.118inch, Stock 1=3393, Supplier 1=Digi-Key, Termination=Crimp, Width=25.1mm
J2: "JAE MX34 Series, 2.2mm Pitch 20 Way 2 Row Right Angle PCB Header, Solder Termination, 3A", Color=Grey, Current Rating=3A, Manufacturer="JAE Electronics", Package Quantity=288, Supplier Part Number 1=670-2924-ND, Category=Connectors, ComponentLink1Description=https://datasheet.ciiva.com/7621/1009688-7621584.pdf?src-supplier=Element14, ComponentLink1URL=https://datasheet.ciiva.com/7621/1009688-7621584.pdf?src-supplier=Element14, ComponentLink2Description=https://datasheet.ciiva.com/4554/sj038751-3818-4554108.pdf?src-supplier=Mouser, ComponentLink2URL=https://datasheet.ciiva.com/4554/sj038751-3818-4554108.pdf?src-supplier=Mouser, ComponentLink3Description=https://datasheet.ciiva.com/11754/0900766b80ddc6f0-11754159.pdf?src-supplier=RSComponents, ComponentLink3URL=https://datasheet.ciiva.com/11754/0900766b80ddc6f0-11754159.pdf?src-supplier=RSComponents, ComponentLink4Description=https://datasheet.ciiva.com/732/transportation-pg-v2-2-732931.pdf?src-supplier=Digi-Key, ComponentLink4URL=https://datasheet.ciiva.com/732/transportation-pg-v2-2-732931.pdf?src-supplier=Digi-Key, Connector Type="Male Pin,Rectangular", Contact Material=Brass, Contact Mating Length=0.303inch, Contact Plating=Tin, Gender=Male, Manufacturer Part Number=MX34020NF1, Mount="Through Hole", Number of Contacts=20, Number of Positions=20, Number of Rows=2, Orientation="Right Angle", Packaging=Rail/Tube, Pitch=0.087inch, Pricing 1="1=1.57000, 10=1.42100, 100=1.21800, 500=1.01500, 1000=0.87000, 5000=0.77140, 10000=0.75400 (USD)", REACH SVHC="No SVHC", RoHS=Yes, Row Spacing=0.118inch, Stock 1=10297, Supplier 1=Digi-Key, Termination=Solder
J3: library part CMP-2000-05118-1, "Micro USB B Type Receptacle, -55 to 85 degC, 5-Pin SMD, RoHS, Tape and Reel", Color=Black, Current Rating=1.8A, Flammability Rating=UL94V-0, Insulation Resistance=1000MOhms, Manufacturer=FCI, Operating Temperature Range=-55Cto+85C, Brand=FCI, Connector Type=MicroUSBTypeBreceptacle, Contact Material=CopperAlloy, Contact Plating=Gold, Datasheet URL=http://www.mouser.com/ds/2/154/10118192-793027.pdf, Datasheet Version="Rev. B, 05/2015", Factory Pack Quantity=1400, Gender=Female, Manufacturer URL=http://www.fci.com/, Mounting Angle=Right, Number of Contacts=5Contact, Packaging=Reel, Product=MicroUSBTypeBConnectors, Product Category=USBConnectors, RoHS=Details, Standard=USB2.0, Termination Style=SMD/SMT
LED1: library part CMP-1426-00010-1, "SMD mono-color Chip LED, WL-SMCW, Super Red", Color="Super Red", Manufacturer="Wuerth Elektronik", ComponentLink1Description="Manufacturer URL", ComponentLink1URL=http://www.we-online.com, ComponentLink2Description=Datasheet, ComponentLink2URL=http://katalog.we-online.com/led/datasheet/150080SS75000.pdf, PackageReference=0805_A, PartNumber=150080SS75000
LED2: library part CMP-1426-00008-1, "SMD mono-color Chip LED, WL-SMCW, Blue", Color=Blue, Manufacturer="Wuerth Elektronik", ComponentLink1Description="Manufacturer URL", ComponentLink1URL=http://www.we-online.com, ComponentLink2Description=Datasheet, ComponentLink2URL=http://katalog.we-online.com/led/datasheet/150080BS75000.pdf, PackageReference=0805_A, PartNumber=150080BS75000
P1: library part CMP-1502-00949-1, "THT Vertical Pin Header WR-PHD, Pitch 1.27 mm, Dual Row, 14 pins", Contact Resistance=20mOhm, Manufacturer="Wurth Elektronik", Operating Temperature=-40to105degC, Rated current=1A, Withstanding Voltage=500VAC, Working Voltage=100VAC, Datasheet URL=https://katalog.we-online.de/em/datasheet/62201421121.pdf, Gender=Male, Manufacturer URL=http://www.we-online.de, Mounting Technology=THT, Orientation=Vertical, Package Reference=62201421121, Packaging=Box, Part Number=62201421121, Pin Number=14, Pitch=1.27mm, Publisher=WurthElektronik, Row Number=Dual
P2: library part CMP-2000-07492-1, "Male Header, Pitch 2.54 mm, 1 x 2 Position, Height 8.21 mm, Tail Length 3.05 mm, -65 to 105 degC, RoHS, Bulk", Case\/Package=100, Colour=Black, Current Rating=3A, Flammability Rating=UL94V-0, High Temperature Housing=Yes, Manufacturer="TE Connectivity", Max Current Rating=5A, Max Operating Temperature=105degC, Min Operating Temperature=-65degC, Package Description="Male Header, Pitch 2.54 mm, 1 x 2 Position, Height 8.21 mm, Tail Length 3.05 mm", Package Quantity=500, Approvals=CSA, Board Standoff=No(Without), Connector Type=Header, Contact Gender=Male, Contact Material=CopperAlloy, Contact Mating Length=0.23inch, Contact Plating=Matte, Contact Protection=No(Without), Contact Shape=Square, Datasheet URL=http://www.te.com/commerce/DocumentDelivery/DDEController?Action=showdoc&DocId=Customer+Drawing%7F146280%7FH1%7Fpdf%7FEnglish%7FENG_CD_146280_H1.pdf%7F5-146280-2, Datasheet Version="Rev. H1, 08/2016", Depth=2.34mm, Gasket=No(Without), High Speed Serial Data Connector=No, Housing Colour=Black, Housing Material=Polymer, Keyed=No, Length=4.67mm, Manufacturer URL=http://www.te.com/, Mating Alignment=No(Without), Mating Connector Lock=No(Without), Mating Post Length=0.23inch, Mount=ThroughHole, Mounting Technology=ThroughHole, Number of Contacts=2, Number of Positions=2, Number of Rows=1, Orientation=Straight, Package Reference=5-146280-2, Packaging=Carton, Panel Mount Retention=No(Without), PCB Mount Retention=Without, PCB Mounting Orientation=Vertical, PCB Thickness=0.063inch, Pitch=2.54mm, Radiation Hardening=No, RoHSCompliant=true, Row Spacing=2.54mm, Selectively Loaded=No(Without), Stabilizers=No(Without), Termination=ThroughHole, Termination Post Length=0.12inch
R1 R2 R3 R4 R5 R6 R7 R8 R11 R12 R13 R22 R23: library part RMCF0603FT4K70, "Res Thick Film 0603 4.7K Ohm 1% 1/10W 100ppm/C Molded SMD SMD Paper T/R", Case Code (Imperial)=0603, Case Code (Metric)=1608, Manufacturer="Stackpole Electronics", Max Operating Temperature=155°C, Max Power Dissipation=100mW, Min Operating Temperature=-55°C, Resistance=4.7kR, Resistor Type="Thick Film", Supplier Part Number 1=RMCF0603FT4K70CT-ND, Temperature Coefficient=100ppm/°C, Tolerance=1%, Case/Package=0603, Category="Chip SMD Resistors", ComponentLink1Description=https://datasheet.ciiva.com/26835/getdatasheetpartid-486078-26835642.pdf?src-supplier=Verical, ComponentLink1URL=https://datasheet.ciiva.com/26835/getdatasheetpartid-486078-26835642.pdf?src-supplier=Verical, Contact Plating=Tin,Matte, Depth=0.8mm, Features="Automotive AEC-Q200", Height=0.022inch, Lead Free="Lead Free", Length=1.55mm, Manufacturer Part Number=RMCF0603FT4K70, Military Standard=Not, Mount="Surface Mount", Number of Terminations=2, Packaging="Tape and Reel", Power Rating=100mW, Pricing 1="1=0.10000, 10=0.01500, 100=0.00590, 1000=0.00265, 2500=0.00230 (USD)", Radiation Hardening=No, RoHS=Yes, Stock 1=1530231, Supplier 1=Digi-Key, Width=0.031inch
R9 R10: library part CMP-1659-00038-1, "Chip Resistor, 560 Ohm, +/- 1%, 0.1 W, -55 to 155 degC, 0603 (1608 Metric), RoHS, Tape and Reel", Case Code (Imperial)=0603, Case Code (Metric)=1608, Max Operating Temperature="155 degC", Min Operating Temperature="-55 degC", Power Rating="100 mW", Resistance=560R, Tolerance=1%, Voltage Rating="50 V", Case\Package=0603, ComponentLink1Description="Manufacturer URL", ComponentLink1URL=http://www.yageo.com/, ComponentLink2Description=Datasheet, ComponentLink2URL=http://www.yageo.com/documents/recent/PYu-RC_Group_51_RoHS_L_04.pdf, DatasheetVersion="Rev. 4, 02/2016", Height="0.45 mm", Length="1.6 mm", Mount="Surface Mount", PackageDescription="2-Pin Surface Mount Device, Body 1.6 x 0.8 mm", PackageReference=0603, Packaging="Tape and Reel", Pins=2, REACH SVHC="No SVHC", RoHSCompliant=true, Voltage Rating (DC)="50 V", Width="0.8 mm"
R14 R15: library part CMP-2000-03099-1, Manufacturer="Vishay Dale", Part Number=CRCW060322R0JNTA
R16: library part CMP-2000-02996-1, Manufacturer="Vishay Dale", Part Number=CRCW06031K50FKTA, Res=1K5
SW1: "SWITCH TOGGLE DIP SPDT 150MA 30V / WIRED: / 1  2  3 / 4  5  6", Contact Current Rating=150mA, Manufacturer=Grayhill, Max Operating Temperature=85°C, Max Voltage Rating (DC)=30V, Min Operating Temperature=-40°C, Package Quantity=13, Supplier Part Number 1=GH7721-ND, Actuator Length=5.08mm, Actuator Type=Toggle, Body Material=Thermoplastic, Category="DIP Switches", ComponentLink1Description=https://datasheet.ciiva.com/16198/dip-series-76-and-78-spdt-16198550.pdf?src-supplier=Onlinecomponents.com, ComponentLink1URL=https://datasheet.ciiva.com/16198/dip-series-76-and-78-spdt-16198550.pdf?src-supplier=Onlinecomponents.com, ComponentLink2Description=https://datasheet.ciiva.com/2865/dip-series-76-and-78-spdt-2865964.pdf?src-supplier=Digi-Key, ComponentLink2URL=https://datasheet.ciiva.com/2865/dip-series-76-and-78-spdt-2865964.pdf?src-supplier=Digi-Key, Contact Material="Copper Alloy,Gold", Contact Plating=Gold, Current Rating=150mA, Depth=9.65mm, Electrical Life=2000Cycles, Lead Free="Lead Free", Length=0.78inch, Manufacturer Part Number=76STC02T, Max Current Rating=150mA, Mechanical Life=2000Cycles, Mount="Through Hole,PCB", Number of Circuits=4, Number of Positions=4, Orientation=Straight, Packaging=Rail/Tube, Pitch=0.1inch, Pricing 1="1=4.74000, 10=4.54200, 25=4.14720, 100=3.59410, 250=3.25836, 500=3.02140, 1000=2.80417, 2500=2.54745, 5000=2.36972 (USD)", Radiation Hardening=No, REACH SVHC="No SVHC", RoHS=Yes, Stock 1=149, Supplier 1=Digi-Key, Termination="PC Pins", Throw Configuration=SPDT, Voltage Rating=30V, Voltage Rating (DC)=30V, Washable=No
U1: library part CMP-1685-00014-1, "Fixed Positive Voltage Regulator, 7 to 25 V, 1.5 A, 0 to 125 degC, 3-Pin DDPAK (KTT), Green (RoHS / & no Sb/Br), Tape and Reel", Case Code (Imperial)=0603, Case Code (Metric)=1608, Max Operating Temperature="155 degC", Min Operating Temperature="-55 degC", Package Quantity=5000, Power Rating="100 mW", Resistance="220 Ohm", Tolerance=1%, Voltage Rating="50 V", Case\Package=0603, Code_JEDEC=TO-263, ComponentLink1Description="Manufacturer URL", ComponentLink1URL=http://www.ti.com/, ComponentLink2Description=Datasheet, ComponentLink2URL=http://www.ti.com/lit/ds/symlink/ua7805.pdf, DatasheetVersion="SLVS056P, 01/2015", Height="0.45 mm", Length="1.6 mm", Mount="Surface Mount", PackageDescription="3-Pin Surface Mount Device, Body 10.16 x 9.015 mm, Pitch 2.54 mm", PackageReference=KTT0003A, Packaging="Tape and Reel", Pins=2, REACH SVHC="No SVHC", RoHSCompliant=true, Voltage Rating (DC)="50 V", Width="0.8 mm"
U2: "8 SOIC 3.90mm(.150in) TUBECAN Flexible Data Rate Transceiver", Manufacturer=Microchip, Supplier Part Number 1=MCP2562FD-E/SN-ND, Category="Interface ICs", ComponentLink1Description=https://datasheet.ciiva.com/46406/1821190-46406053.pdf?src-supplier=Element14, ComponentLink1URL=https://datasheet.ciiva.com/46406/1821190-46406053.pdf?src-supplier=Element14, ComponentLink2Description=https://datasheet.ciiva.com/48512/mcp2562fd-e-mf-eng-tds-48512074.pdf?src-supplier=Distrelec, ComponentLink2URL=https://datasheet.ciiva.com/48512/mcp2562fd-e-mf-eng-tds-48512074.pdf?src-supplier=Distrelec, ComponentLink3Description=https://datasheet.ciiva.com/48473/20005284a-48473180.pdf?src-supplier=Avnet, ComponentLink3URL=https://datasheet.ciiva.com/48473/20005284a-48473180.pdf?src-supplier=Avnet, ComponentLink4Description=https://datasheet.ciiva.com/46406/1821190-46406061.pdf?src-supplier=Element14, ComponentLink4URL=https://datasheet.ciiva.com/46406/1821190-46406061.pdf?src-supplier=Element14, Manufacturer Part Number=MCP2562FD-E/SN, Pricing 1="1=0.96000, 25=0.80000, 100=0.73000 (USD)", RoHS=Yes, Stock 1=1433, Supplier 1=Digi-Key
U3: library part CMP-2000-07604-2, "IC REG LINEAR 3.3V 300MA SOT23-5", Case/Package=SOT-23-5, Dropout Voltage=380mV, Max Input Voltage=5.5V, Max Operating Temperature=125°C, Max Output Current=300mA, Min Input Voltage=2.5V, Min Operating Temperature=-40°C, Nominal Output Voltage=3.3V, Operating Supply Current=42uA, Power Supply Rejection Ratio (PSRR)=60dB, Quiescent Current=38uA, Accuracy=3%, Height=1.1mm, Length=2.9mm, Mount="Surface Mount", Number of Outputs=1, Number of Pins=5, Output Current=300mA, Output Type=Fixed, Output Voltage=3.3V, Packaging="Tape and Reel", REACH SVHC="No SVHC", Width=1.6mm
U4: library part CMP-1305-00036-1, "Single Supply Quad Comparators, 0 to 70 degC, 14-Pin SOIC, Pb-Free, Tape and Reel", Manufacturer="On Semiconductor", ComponentLink1Description="Manufacturer URL", ComponentLink1URL=http://www.onsemi.com/, ComponentLink2Description=Datasheet, ComponentLink2URL=http://www.onsemi.com/pub_link/Collateral/LM339-D.PDF, ComponentLink3Description="Package Specification", ComponentLink3URL=http://www.onsemi.com/pub_link/Collateral/751A-03.PDF, DatasheetVersion="Rev. 20", IO Typ (mA)=16, Mounting Technology="Surface Mount", PackageDescription="14-Pin Small Outline Integrated Circuit, Body 8.65 x 3.9 mm, Pitch 1.27 mm", PackageReference=SOIC-14-751A-03, PackageVersion="Rev. K, 05/2011", Packing="Tape and Reel", PartNumber=LM339DR2G, RoHS=TRUE
U5/6: library part CMP-0237-00046-3, "ARM Cortex-M3 32-bit MCU, 32 KB Flash, 10 KB Internal RAM, 37 I/Os, 48-pin UFQFPN, -40 to 85 degC, Tray", I/Os (High Current)=37, Operating Frequency(F) (Processor speed) (MHz)=72, Supply Voltage(Vcc) min (V)=2, A/D Converter="2x12-bit (10 Channel)", ComponentLink1Description="Manufacturer URL", ComponentLink1URL=http://www.st.com/web/en/home.html, ComponentLink2Description=Datasheet, ComponentLink2URL=http://www.st.com/st-web-ui/static/active/en/resource/technical/document/datasheet/CD00210843.pdf, ComponentLink3Description="Package Specification", ComponentLink3URL=http://www.st.com/st-web-ui/static/active/en/resource/technical/document/data_brief/DM00071938.pdf, Core="ARM Cortex-M3", DatasheetVersion="Rev. 6", FLASH Size (Prog) (kB)=32, Internal RAM Size (kB)=10, Mounting Technology="Surface Mount", PackageDescription="48-Pin Ultra Thin Fine Pitch Quad Flat No-Lead, 7 x 7 x 0.6 mm Body, 0.5 mm Pitch, Exposed Pad", PackageReference=UFQFPN48, PackageVersion="Rev. 1, 04/2013", Packing=Tray, PartNumber=STM32F103C6U6A
X1: library part CMP-2000-05034-1, "Microprocessor Crystal, 8 MHz, 18 PF, -40 to 85 degC, 2-Pin SMD, RoHS, Tape and Reel", ESR (Equivalent Series Resistance)=100Ohm, Frequency=8MHz, Frequency Stability=±30ppm, Frequency Tolerance=±20ppm, Load Capacitance=18pF, Manufacturer=Abracon, Operating Mode=Fundamental, Operating Temperature=-40degC~85degC, Package / Case=2-SMD, Package Description="2-Pin Surface Mount Device, Body 6 x 3.5 mm", Package Reference=ABM7, Standard Package=1,000, 3D Model="ABM7.pdf /  / ABM7.stp", Catalog Drawings="ABM7SeriesTop /  / ABM7SeriesSide /  / ABM7SeriesBottom", Category=CrystalsandOscillators, Datasheet URL=https://datasheet.ciiva.com/1357/1718755-1357277.pdf, Datasheet Version=Dec-17, Family=Crystals, Featured Product=ABM7andABM11Crystals, Height="0.055\"(1.40mm)", Manufacturer URL=http://www.abracon.com/, Mounting Type=SurfaceMount, Online Catalog=ABM7Series, Other Names="535-9831-2 / ABM7-8.000MHZ-D-2-Y-T / ABM78000MHZD2YT", Packaging=Tape&Reel(TR), RoHS Information=RoHS2/REACHCompliance, Series=ABM7, Size / Dimension="0.236\"Lx0.138\"W(6.00mmx3.50mm)", Type=MHzCrystal

## Via types
v1: diameter 23.62, hole 12, Top Layer to Bottom Layer, tented both sides, 34 vias
v2: diameter 17.72, hole 7.87, Top Layer to Bottom Layer, tented both sides, 33 vias
v3: diameter 19.68, hole 7.87, Top Layer to Bottom Layer, 25 vias
v4: diameter 39.37, hole 19.68, Top Layer to Bottom Layer, tented both sides, 14 vias
v5: diameter 17.72, hole 7.87, Top Layer to Bottom Layer, 1 vias

## Nets (pads, with @x,y where several pads share a name; then routed paths per layer and width w, separated by ;. In a path a pad name is that pad's centre, name@x,y a point inside that pad or via, vN(x,y) a via of type N, cw(c..) or ccw(c..) an arc to the next point about the centre after c; other vN are vias at no path point)
3V3_VREF: C14.1 R3.1 R6.2 U4.8 U4.10 | length 651.6
  Bottom Layer w10: C14.1 2220.8,3346.13 2221.8,3345.13 2251.43,3315.5 2251.43,3251.48 2277.9,3225 2466.54,3225 ; U4.10 2490,3248.46 2466.54,3225 ; U4.8 2590,3230.86 2584.14,3225 2466.54,3225
  Bottom Layer w15: R3.1@2106.87,3345.13 2168.87,3345.13 C14.1@2221.8,3345.13
12V_VREF: C13.1 R22.1 R23.2 U4.4 U4.6 | length 571.9
  Bottom Layer w10: R22.1@2112.9,3402.21 2113.16,3402.48 2166.16,3402.48 2169.12,3405.44 2215.26,3405.44 C13.1@2217.96,3408.14 ; C13.1@2217.96,3405.18 2220.91,3405.18 C13.1@2223.87,3402.21 ; C13.1 2220.91,3408.64 2255,3442.73 2255,3484.14 2275.86,3505 2434.14,3505 ; U4.4 2440,3499.14 2434.14,3505 ; U4.6@2540,3457.91 U4.6 2540,3481.54 2516.54,3505 2434.14,3505
+3V3: C7.1 C8.1 C10.1 C11.1 C12.1 C15.1 C16.1 P1.3 P2.1 R3.2 R4.2 R7.2 R12.2 R16.2 U2.5 U3.5 U5/6.1 U5/6.9 U5/6.24 U5/6.36 U5/6.48 | length 1574.5
  Bottom Layer w10: C8.1 C8.1@2616,2972.38 ; v1(2616,2935) C8.1@2616,2972.38 ; U2.5 2666,2930 2628.39,2967.61 2620.76,2967.61 C8.1@2616,2972.38 ; R7.2@2710.27,3464.26 2762.74,3464.26 v2(2763,3464) ; v1(2930,3352) 2930.58,3351.42 2930.58,3335.19 C12.1@2950.55,3315.22 ; C12.1 2947,3297 2952.86,3291.14 2968.44,3291.14 2973.72,3285.87 2973.72,3278.38 2979.57,3272.52 2987.72,3272.52 ; U5/6.1@3024.84,3115.04 3045.35,3115.04 3045.43,3114.96 3045.43,3086.57 3054.37,3077.64 3074.96,3077.64 3075.04,3077.56 3075.04,3029.33 3053.43,3007.72 3051.14,3007.72 3041.38,2997.95 C7.1@3041.38,2936.03 ; v1(3030.92,2899.31) 3030.92,2914.57 C7.1@3041.38,2925.03 ; U5/6.24 3291.57,3371.3 3291.65,3371.38 C15.1 3352.19,3369.19 3386,3369.19 v1(3388.19,3367) ; v1(3340,3004) 3340.69,3004.69 3340.69,3054.31 C11.1 3341.38,3114.96 3341.46,3115.04 U5/6.36@3341.77,3115.04 ; R12.2 3788.05,3469.53 3821.14,3502.62 3894.86,3502.62 3921,3476.48 3921,3289 3922,3288 3922,3229.86 3916.14,3224 P1.3
  Bottom Layer w20: R3.2 2113.61,3292.25 2113.61,3251.39 v1(2114.31,3250.69) ; U3.5 2275.39,3139.17 2275.39,3145.87 2289.54,3160.01 2291.2,3160.01 2304.3,3173.11 C16.1@2304.3,3195 ; C16.1 v1(2346.26,3195) ; R4.2 R7.2 R7.2@2710.27,3464.26 ; v5(3815,3100) 3820,3095 R16.2
+5V0: C2.1 C9.1 D2.1 U1.3 U2.3 | length 1038.8
  Bottom Layer w15: U1.3@2325,2775 2321.81,2778.19 2321.81,2881.81 2318.62,2885 2318.62,2887.95 2331,2900.33 2363.05,2900.33 2390,2927.28 D2.1 2390,2962.27 2416.95,2989.22 2434.22,2989.22 2491.43,3046.43 2542.67,3046.43 2553.95,3057.72 2553.95,3106.21 2572.55,3124.81 2734.34,3124.81 2790.08,3069.08 2854.16,3005 2952.43,3005 2966.05,2991.38 2954.67,2980 U2.3
+12V0: C1.1 C4.1 F1.2 R1.2 R2.2 R5.2 R8.2 R22.2 U1.1 U4.3 | length 3396
  Top Layer w15: v1(2046.36,3465) 2345,3465 v2(2390,3420) ; v1@2121,2682 2121,2634 2394.17,2360.83 v1(2478,2360.83)
  Bottom Layer w15: F1.2 2087.05,2890 F1.2@2104.51,2890 ; R22.2@2112.9,3461.27 2109.17,3465 v1(2046.36,3465) 2020,3438.64 2020,3280 2154.11,3145.89 2154.11,3076.21 2169.54,3060.77 2169.54,2980.23 C4.1 2184.77,2896.34 2176.38,2887.95 2176.38,2885 2104.51,2885 2125,2864.51 U1.1@2125,2775 ; v1(2121,2685) 2122.65,2686.65 2122.65,2775.65 U1.1@2125,2778 ; v2(2390,3420) U4.3 ; v1(2478,2360.83) 2478,2358.5 2474,2354.5 2474,2237.26 2482.79,2228.47 R1.2 ; R1.2@2519.99,2228.47 2540.99,2228.47 R8.2@2561.99,2228.47 ; R8.2@2561.29,2228.47 2603.99,2228.47 2693,2317.48 2693,2420.48 2701.79,2429.26 2704.53,2429.26 2705.27,2430 3298,2430 3354,2374 3354,2243.79 3362.79,2235 3425.99,2235 R5.2@3480.24,2235
+B_BACKUP: J1.10 J2.10 | length 1149.6
  Top Layer w15: J2.10@3659.76,3370.32 3669.61,3370.32 3698.82,3341.1 3698.82,2562.56 3692,2555.74 v2(3692,2555)
  Bottom Layer w15: J1.10@3400.53,2598.63 3553.37,2598.63 3597,2555 v2(3692,2555)
ACC_CAN_H: J1.7 J2.7 | length 904.6
  Top Layer w10: J1.7 J1.7@3124.93,2616.93
  Bottom Layer w10: J1.7@3140.69,2598.63 3140.69,2632.69 3202,2694 3202,2851 3253.64,2902.64 3413.78,2902.64 3421,2909.86 3421,2997.14 3458.86,3035 3541.51,3035 3616.98,3110.47 J2.7@3636.14,3110.47
ACC_CAN_L: J1.18 J2.18 | length 701.3
  Top Layer w8: v2(3183.14,2848.94) 3238.67,2848.94 3246.59,2841.02 3395.02,2841.02 3432,2878 3432,3098.83 3465.79,3132.61 3465.79,3141.86 3477.71,3153.78 J2.18@3498.35,3153.78
  Bottom Layer w8: J1.18@3167.87,2736.8 3167.87,2759.69 3183.14,2774.96 v2(3183.14,2848.94)
BLUE_LED: R10.1 U5/6.3 | length 362.8
  Bottom Layer w8: R10.1 2705.53,3207.06 2779.59,3133 2958.03,3133 2979.44,3154.41 U5/6.3@3024.84,3154.41
BOOT0: P2.2 R11.2 U5/6.44 | length 150.7
  Bottom Layer w10: 3153.78,3027.72 3153.78,3013.58 3159.64,3007.72 3184.68,3007.72 3192.47,2999.93 3195.47,2999.93 3195.47,2969.53 3230,2935 P2.2
CAN1_RX: U2.4 U5/6.45 | length 475.5
  Bottom Layer w10: U2.4 2941.81,2930 2986,2885.81 2986,2883.2 3019.2,2850 3114.46,2850 3135,2870.54 3135,3022 3134.09,3022.91 U5/6.45@3134.09,3064.84
CAN1_TX: U2.1 U5/6.46 | length 630.9
  Bottom Layer w10: U2.1 2898.85,3081.55 2940.81,3081.55 2954.26,3095 2989.14,3095 3000,3084.14 3000,2889 3025,2864 3108.66,2864 3114.52,2869.86 3114.52,2976.84 3114.41,2976.95 U5/6.46@3114.41,3064.84
EPS_TO_LKAS_RX: J1.12 SW1.C2 | length 1519.1
  Bottom Layer w10: J1.12 2632.8,2630.64 2643.18,2620.26 2643.18,2514.9 2655.95,2502.12 2674.02,2502.12 2675.37,2503.47 3455.25,2503.47 3456.84,2505.06 3533.01,2505.06 3556.54,2528.59 3634.41,2528.59 3657.94,2505.06 3771.94,2505.06 SW1.C2@3881.02,2395.98
EPS_TO_LKAS_TX: J2.12 R2.1 SW1.2B U4.5 | length 2971.8
  Top Layer w10: v2(2514.72,3466.86) 2494,3446.13 2494,2763.61 2485,2754.61 2485,2453.91 v1(2600,2338.91) ; v2(3425.99,2369.01) 3425.99,2560.29 3475.08,2609.38 3475.08,2623.1 3486.08,2634.09 J2.12@3498.35,2634.09
  Bottom Layer w10: U4.5 2492.87,3466.86 v2(2514.72,3466.86) ; v1(2600,2338.91) 2602.61,2341.51 2602.61,2353.42 2675.37,2426.18 2694.95,2445.76 2697.7,2445.76 2698.43,2446.5 3348.5,2446.5 v2(3425.99,2369.01) R2.1 ; J2.12 3499.28,2643 3722.93,2643 SW1.2B@3892.02,2473.91 ; SW1.2B@3891.68,2471.35 SW1.2B@3891.68,2478.85
EPS_TO_LKAS_TX1: R1.1 SW1.2A U4.14 | length 2301
  Top Layer w10: v2(2301,3303.65) 2301,2586.03 2510.36,2376.66 2510.36,2345.64 v1@2511,2345
  Bottom Layer w10: U4.14 2290,3294.23 2299.42,3303.65 v2(2301,3303.65) ; R1.1 2510.36,2291.9 v1(2510.36,2345) 2538.73,2345 2667.85,2474.12 2685.62,2474.12 2686,2474.5 3385.88,2474.5 3406.19,2454.19 3477.03,2454.19 3489.85,2467 SW1.2A@3590.22,2467
F_CAN_H: J1.2 J2.2 U2.7 | length 1644.7
  Top Layer w8: J1.2@2707.61,2598.63 2707.61,2622.25 2763,2677.64 2763,2765 2803,2805 3348,2805 3395,2758 3395,2757 3466,2686 3634.9,2686 J2.2
  Bottom Layer w8: U2.7 2685.7,3031 2731,3031 2763,2999 2763,2677.64 2707.61,2622.25 J1.2@2707.61,2598.63
F_CAN_L: J1.13 J2.13 U2.6 | length 1152.9
  Top Layer w10: J1.13@2735.17,2736.43 2735.17,2795.17 2765,2825 3363,2825 3450.99,2737.01 3482.05,2737.01 J2.13@3498.35,2720.71
  Bottom Layer w10: U2.6 2703.4,2980 2735.17,2948.23 J1.13@2735.17,2736.43
GND: C1.2 C2.2 C3.2 C4.2 C5.2 C6.2 C7.2 C8.2 C9.2 C10.2 C11.2 C12.2 C13.2 C14.2 C15.2 C16.2 J1.14 J2.14 J3.5 LED1.1 LED2.1 P1.5 P1.7 P1.11 R6.1 R11.1 R13.2 R23.1 U1.2 U1.4 U2.2 U2.8 U3.2 U4.12 U5/6.8 U5/6.23 U5/6.35 U5/6.47 U5/6.49 | length 2463.1
  Top Layer w10: LED1.1 2234,2281.66 LED2.1 ; v2(3740.68,2985.87) 3740.68,2967.06 3743.56,2964.18 J3.5
  Bottom Layer w6: 2432.5,2652.5 2443.5,2652.5 2448,2657 2448,2794.69 v4(2455.24,2801.92)
  Bottom Layer w10: R6.1 2171.83,3295.93 2214.89,3295.93 C14.2 ; R23.1 2172.06,3458.59 2214.76,3458.59 C13.2@2215,3458.35 ; C3.2 2209.65,3196.03 2220.52,3206.89 2231.23,3206.89 ; v1(2215,3490) C13.2@2215,3458.35 ; C14.2@2217.84,3297.88 2217.84,3252.16 v1@2231.58,3238.42 ; C13.2@2217.96,3455.39 C13.2@2215,3458.35 ; v1(2615,3075) 2615,3028.62 C8.2 2613.95,3024.62 2623.72,3034.39 2623.72,3037.72 2666,3080 U2.8 ; v1(2623,3270) 2678.46,3270 C5.2 ; v1(2630,3344) 2678.46,3344 C6.2 ; U2.8@2680.2,3084.5 U2.8@2684.7,3089 ; U2.2 2901.61,3034.31 2964.69,3034.31 2970,3039.62 v1(2970,3073.19) ; v1(2905,3288) 2927.41,3265.59 C12.2@2942.26,3265.59 ; C12.2@2948.26,3265.59 2961.01,3252.83 U5/6.8@3024.84,3252.83 ; C10.2@3088.62,2995 3094.72,3001.1 3094.72,3027.72 ; C7.2 3090,2923.65 v1(3090,2891) ; C7.2@3089.65,2935 C10.2@3089.65,2995 ; R11.1 3260.25,2986.28 v1(3292.28,2986.28) ; U5/6.23 3271.89,3430.14 3277.75,3436 3331.43,3436 3337.28,3430.14 3337.28,3428.39 3347.05,3418.62 C15.2 3351.19,3419.81 3387,3419.81 v1(3388.19,3421) ; U5/6.35 3391.28,3134.72 3399.66,3126.34 3399.66,3073.57 3398.39,3072.3 3398.39,3064.76 3387.81,3054.19 3387.81,3010.16 3380.69,3003.04 v1(3380.69,2978.35)
  Bottom Layer w12: v2(2370,3333) 2390,3313 U4.12
  Bottom Layer w15: 2231.23,3206.89 v1@2231.23,3233.42
  Bottom Layer w30: C1.2@2223.62,2885 2223.86,2884.76 2223.86,2840 2223.86,2823.39 U1.2@2225,2822.24 ; U1.2@2225,2825.24 2225,2778 v1(2225,2683) 2225,2618 2230,2613 ; U1.2@2225,2835 2227,2837 v1(2271,2837) 2271.38,2837.38 2271.38,2885 2271.61,2885.24 2271.61,2897.34 2285.23,2910.96 C4.2 2285.23,2975.86 2265.96,2995.13 2251.54,2995.13 2240.41,3006.26 2240.41,3025.73 2235,3031.14 U3.2 ; 2227.75,3196.89 2254.48,3196.89 2255.35,3196.03 C16.2 ; v2(3798,2635) 3813.53,2619.47 R13.2
  other v1: 2234,2284.66 2229.65,3235
  other v3: 3096.69,3136.69 3140,3136.69 3183.31,3136.69 3226.61,3136.69 3269.92,3136.69 3096.69,3180 3140,3180 3183.31,3180 3226.61,3180 3269.92,3180 3096.69,3223.31 3140,3223.31 3183.31,3223.31 3226.61,3223.31 3269.92,3223.31 3096.69,3266.61 3140,3266.61 3183.31,3266.61 3226.61,3266.61 3269.92,3266.61 3096.69,3309.92 3140,3309.92 3183.31,3309.92 3226.61,3309.92 3269.92,3309.92
  other v4: 2418,2298 2231,2348 2208,2415 2397,2440 2141,2455 2521,2476 2104,2491 2329,2499 2237,2590 2522,2602 2381,2606 2414,2703 2405,2790
IGN1: F1.1 J1.19 J2.19 | length 3296.8
  Top Layer w20: J1.19@3245.82,2727.39 3245.82,2680.83 3255,2671.65 3255,2507.26
  Top Layer w25: v1(3370,2861.83) 3410,2901.83 3410,3175.67 3474.72,3240.39 J2.19@3498.35,3240.39
  Top Layer w30: v1@2045,3185 2045,2263.37 2081.37,2227 2599,2227 2663,2291 2663,2444.43 2680.57,2462 3209.74,2462 3255,2507.26
  Bottom Layer w25: J1.19@3254.86,2736.43 3254.86,2744.86 3370,2860 v1(3370,2861.83)
  Bottom Layer w30: v1(2045,3190) 2080,3155 F1.1
LDW_OFF_IND: J1.11 J2.11 | length 1068.4
  Top Layer w20: J1.11@2561.95,2690.79 2562.41,2690.33 2580.17,2690.33 2650.29,2620.22 2650.29,2535.07 2652.99,2535.07 2664.13,2523.93 v1(2664.99,2523.93)
  Bottom Layer w15: v1(2664.99,2523.93) 2666.64,2522.28 2673.58,2522.28 2675.89,2519.97 3448.41,2519.97 3475.93,2547.48 J2.11@3498.35,2547.48
LDW_OFF_SW: J1.8 J2.8 | length 953.7
  Top Layer w15: v2(3576.23,2715.5) 3576.23,2716.24 3573.46,2719.01 3573.46,3167.87 3602.68,3197.09 J2.8@3636.14,3197.09
  Bottom Layer w15: J1.8 3211.54,2592.67 3230.07,2611.21 3247.62,2611.21 3290.41,2654 3377,2654 3410,2687 3547.73,2687 v2(3576.23,2715.5)
LKAS_TO_EPS_RX: J2.1 SW1.C1 | length 263.2
  Top Layer w15: SW1.C1@3590.69,2366.53 3600.53,2366.53 3641.56,2407.56 3641.56,2595.21 J2.1
LKAS_TO_EPS_TX: J1.1 R5.1 SW1.1B U4.7 | length 2577.5
  Top Layer w10: v2(2570,3466.86) 2570,3431.81 2529,3390.81 2529,2809.8 2508,2788.8 2508,2671.63 2581,2598.63 J1.1@2621,2598.63 ; v2(3466,2347) 3467,2348 3467,2475 v2(3468,2476)
  Bottom Layer w10: v2(2570,3466.86) 2587.13,3466.86 U4.7 ; J1.1 2605.24,2508.96 2626.08,2488.12 2679.82,2488.12 2680.2,2488.5 3391.68,2488.5 3404.18,2476 v2(3468,2476) ; v2(3466,2347) 3480.99,2332.01 3480.99,2297.7 R5.1 ; R5.1@3485.39,2297.7 3485.39,2295.06 3493.71,2286.73 3496.35,2286.73 3557.08,2226 3856.57,2226 3876.52,2245.95 3876.52,2261.77 SW1.1B@3881.17,2266.41
LKAS_TO_EPS_TX1: R8.1 SW1.1A U4.13 | length 2344.4
  Top Layer w10: v2(2351,3303.65) 2348.91,3303.65 2338.75,3293.49 2334.49,3293.49 2324.45,3283.45 2324.45,2592.27 2558.57,2358.16 2558.57,2337.43 v1@2562.61,2333.39
  Bottom Layer w10: U4.13 2340,3294.23 2349.42,3303.65 v2(2351,3303.65) ; R8.1 2558.57,2288.95 v1(2558.57,2334) 2684.7,2460.12 2691.42,2460.12 2691.8,2460.5 3380.08,2460.5 3574.05,2266.53 SW1.1A@3590.69,2266.53
NetC3_1: C3.1 D1.2 D2.2 U3.1 U3.3 | length 565.2
  Bottom Layer w15: C3.1 2160.35,3175.65 2173.11,3162.89 2173.11,3111.73 2179.84,3105 2206.64,3105 2231.64,3080
  Bottom Layer w20: U3.3 2197.6,3040.51 2197.6,3067.6 2210,3080 2231.64,3080 2253.27,3080 2272.4,3060.87 U3.1 2327.24,3033.82 2390,3096.57 D2.2 D1.2@2485,3114.29
NetLED1_2: LED1.2 R9.2 | length 1785.9
  Top Layer w10: LED1.2@2157,2366.34 2155.03,2366.34 2138.38,2382.99 2138.38,2384.96 2070,2453.34 2070,3358.14 2077.72,3365.86 2397.28,3365.86 2421.14,3342 2421.14,3212.86 v1(2449,3185)
  Bottom Layer w10: v1(2449,3185) 2451.61,3187.61 2451.61,3195.75 2452.86,3197 2586,3197 2627,3156 R9.2
NetLED2_2: LED2.2 R10.2 | length 1791.5
  Top Layer w10: LED2.2 2309.03,2364.34 2292.38,2380.99 2292.38,2382.96 2085.33,2590.01 2085.33,3344.14 2093.05,3351.86 2383.28,3351.86 2391,3344.14 2391,3200 v1(2392,3199)
  Bottom Layer w10: v1(2392,3199) 2395.69,3199 2407.69,3211 R10.2
NRST: P1.12 R12.1 U5/6.7 | length 1285
  Top Layer w8: v1(2908.42,3249.42) 2992,3333 v2(2992,3495)
  Bottom Layer w8: v1(2908.42,3249.42) 2924.7,3233.15 U5/6.7@3024.84,3233.15 ; v2(2992,3495) 3628,3495 3712.53,3410.47 R12.1 3748.8,3419.27 3828.27,3419.27 P1.12
OSC_IN: C5.1 U5/6.5 X1.2 | length 377.7
  Bottom Layer w10: C5.1 2741.69,3263.86 2796,3263.86 2801.14,3269 2827.14,3269 2833,3263.14 X1.2 2842.43,3193.78 U5/6.5@3024.84,3193.78
OSC_OUT: C6.1 U5/6.6 X1.1 | length 387.9
  Bottom Layer w10: C6.1@2736,3339 2818.35,3339 X1.1 2833,3294 2913.54,3213.46 U5/6.6@3024.84,3213.46
PA0: U5/6.10
PA1: U5/6.11
PA4: U5/6.14
PA5: U5/6.15
PA6: U5/6.16
PA7: U5/6.17
PA8: U5/6.29
PA15: U5/6.38
PB0: U5/6.18
PB1: U5/6.19
PB2: U5/6.20
PB3: U5/6.39
PB4: U5/6.40
PB5: U5/6.41
PB6: U5/6.42
PB7: U5/6.43
PB10: U5/6.21
PB11: U5/6.22
PB12: U5/6.25
PB13: U5/6.26